# Altium PCB miaow-foc-board.bak.pcbdoc (part 1 of 2)
Units mm, origin at the board's own origin, x right, y up, seen from the top; angles counter-clockwise.
Board outline 70 x 80 mm, 6 copper layers (SIG1, GND2, SIG3, PWR4, GND5, SIG6), stack 1.538 mm thick; 418 components, 393 nets, 2057 pads, 83 vias.
Unrouted connection lines stored in the file: 1269.
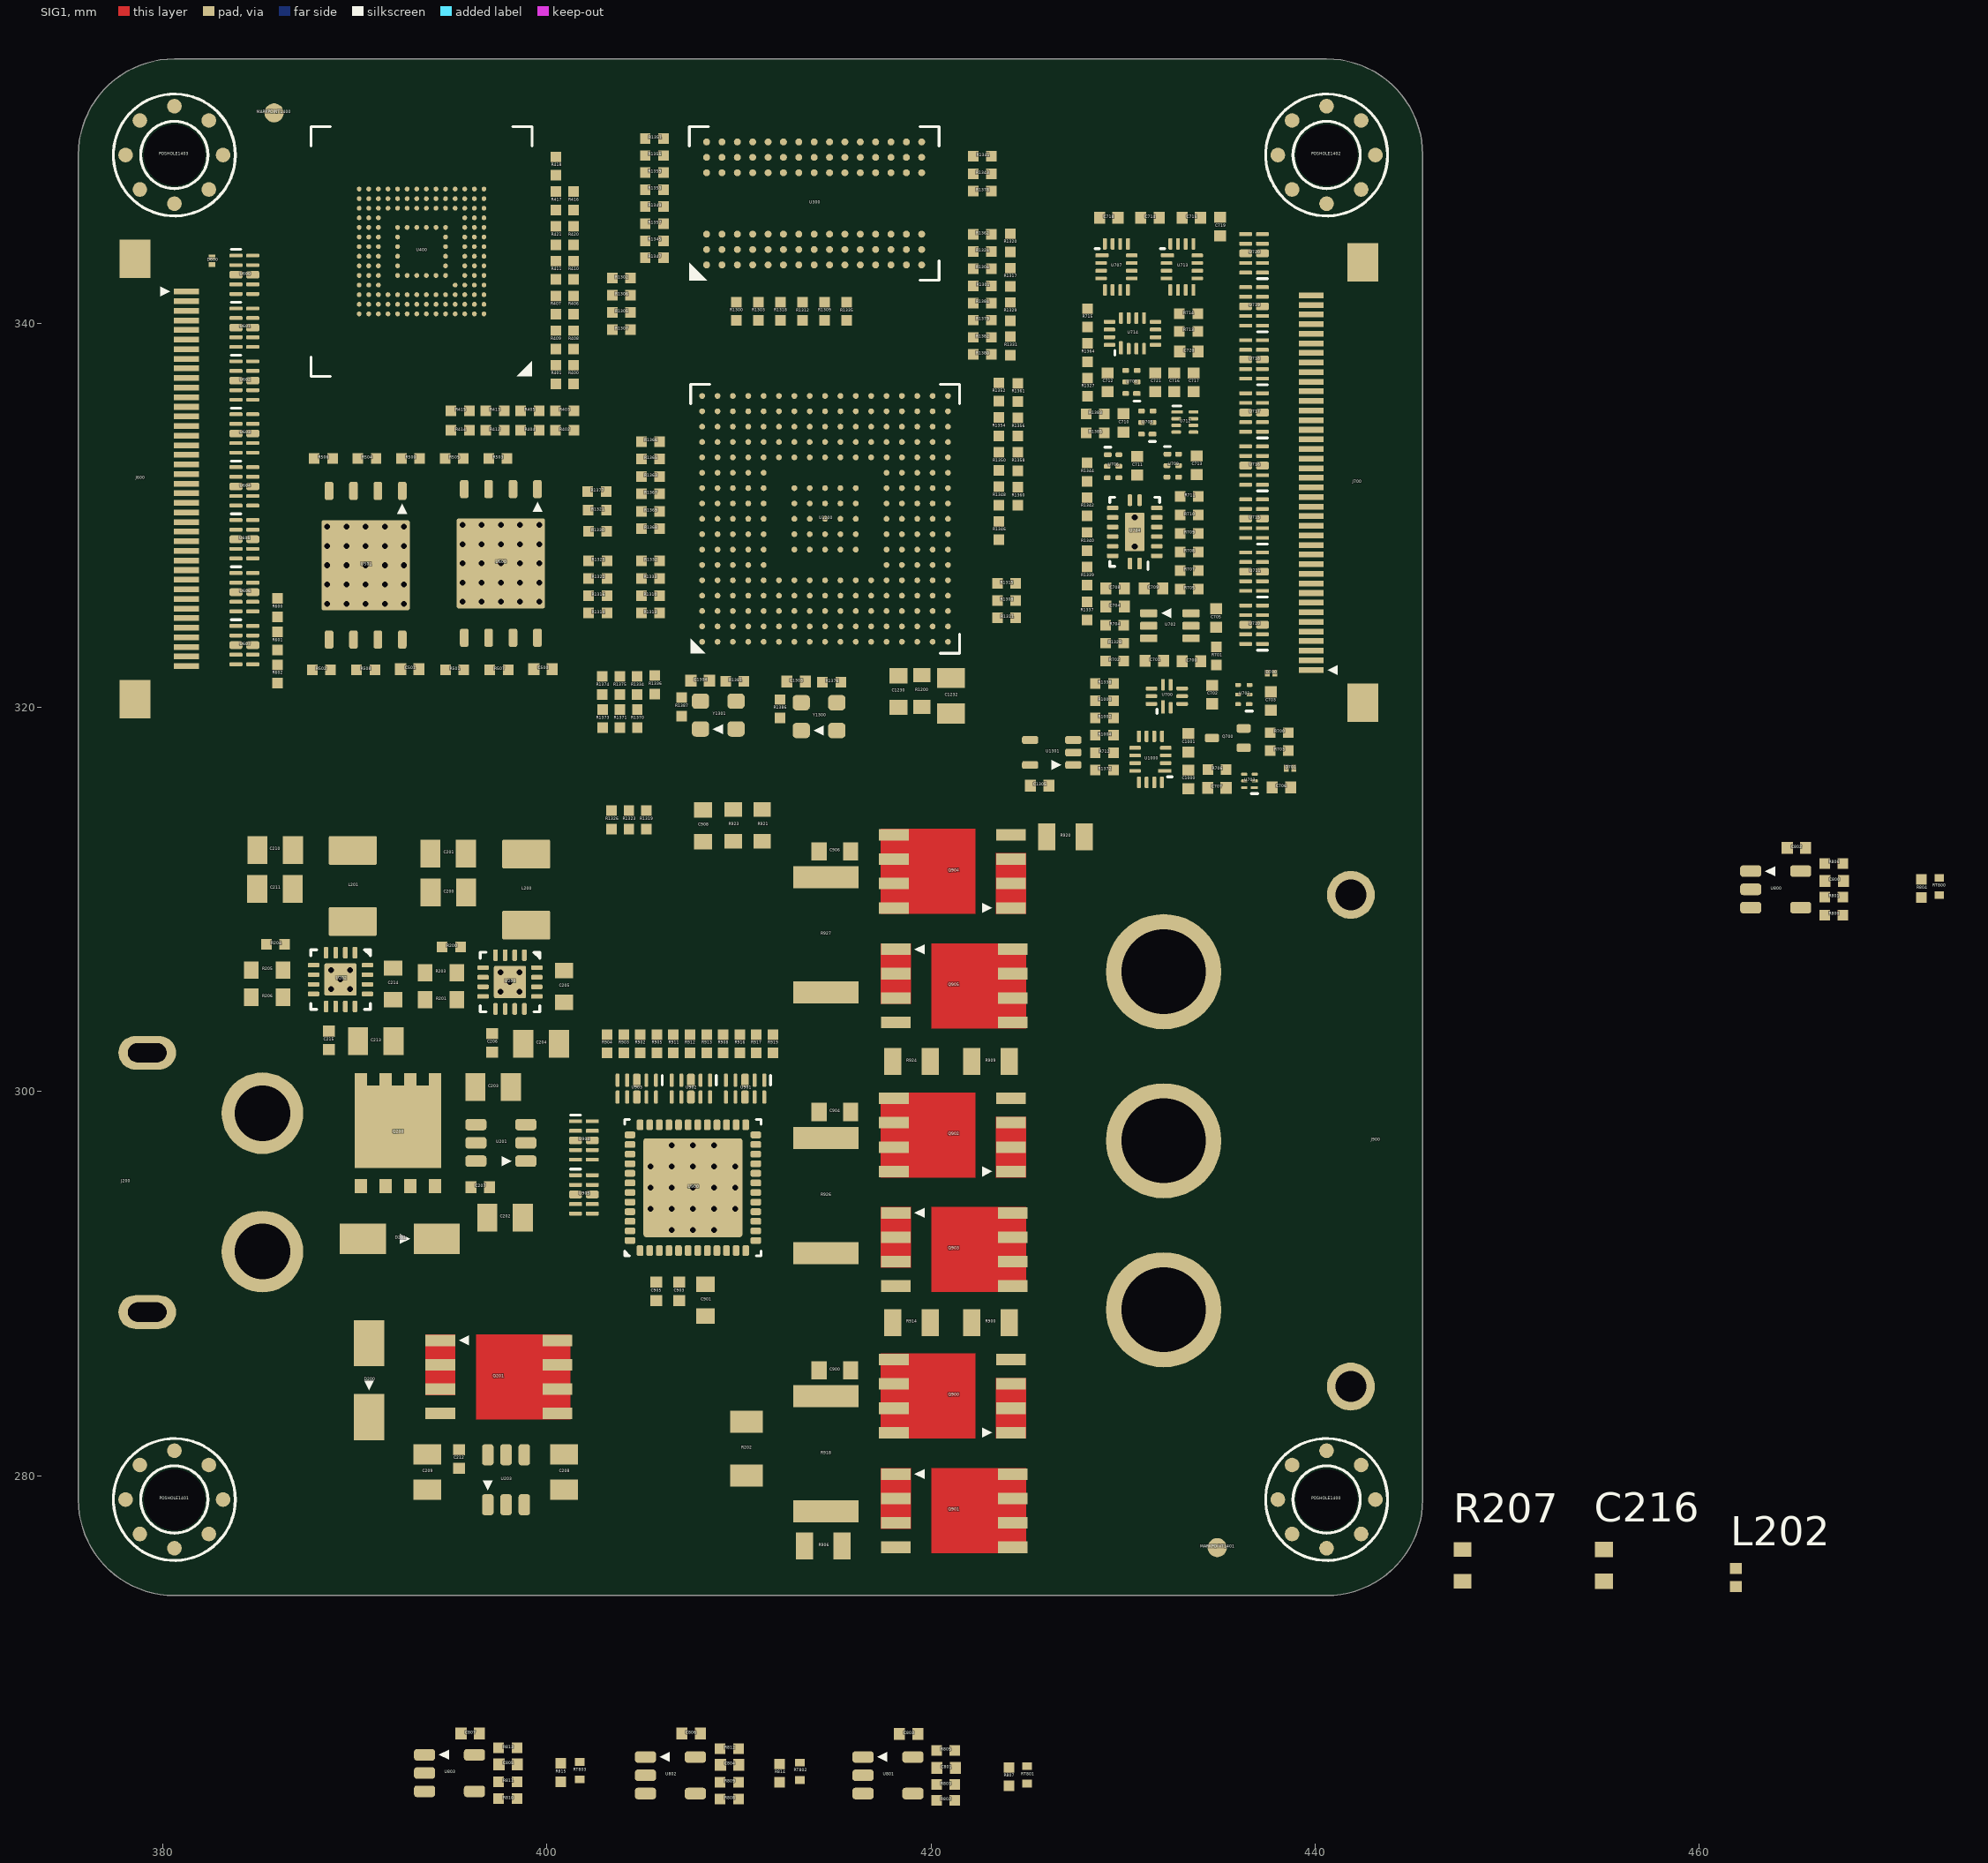
[diagram p0: SIG1 view]
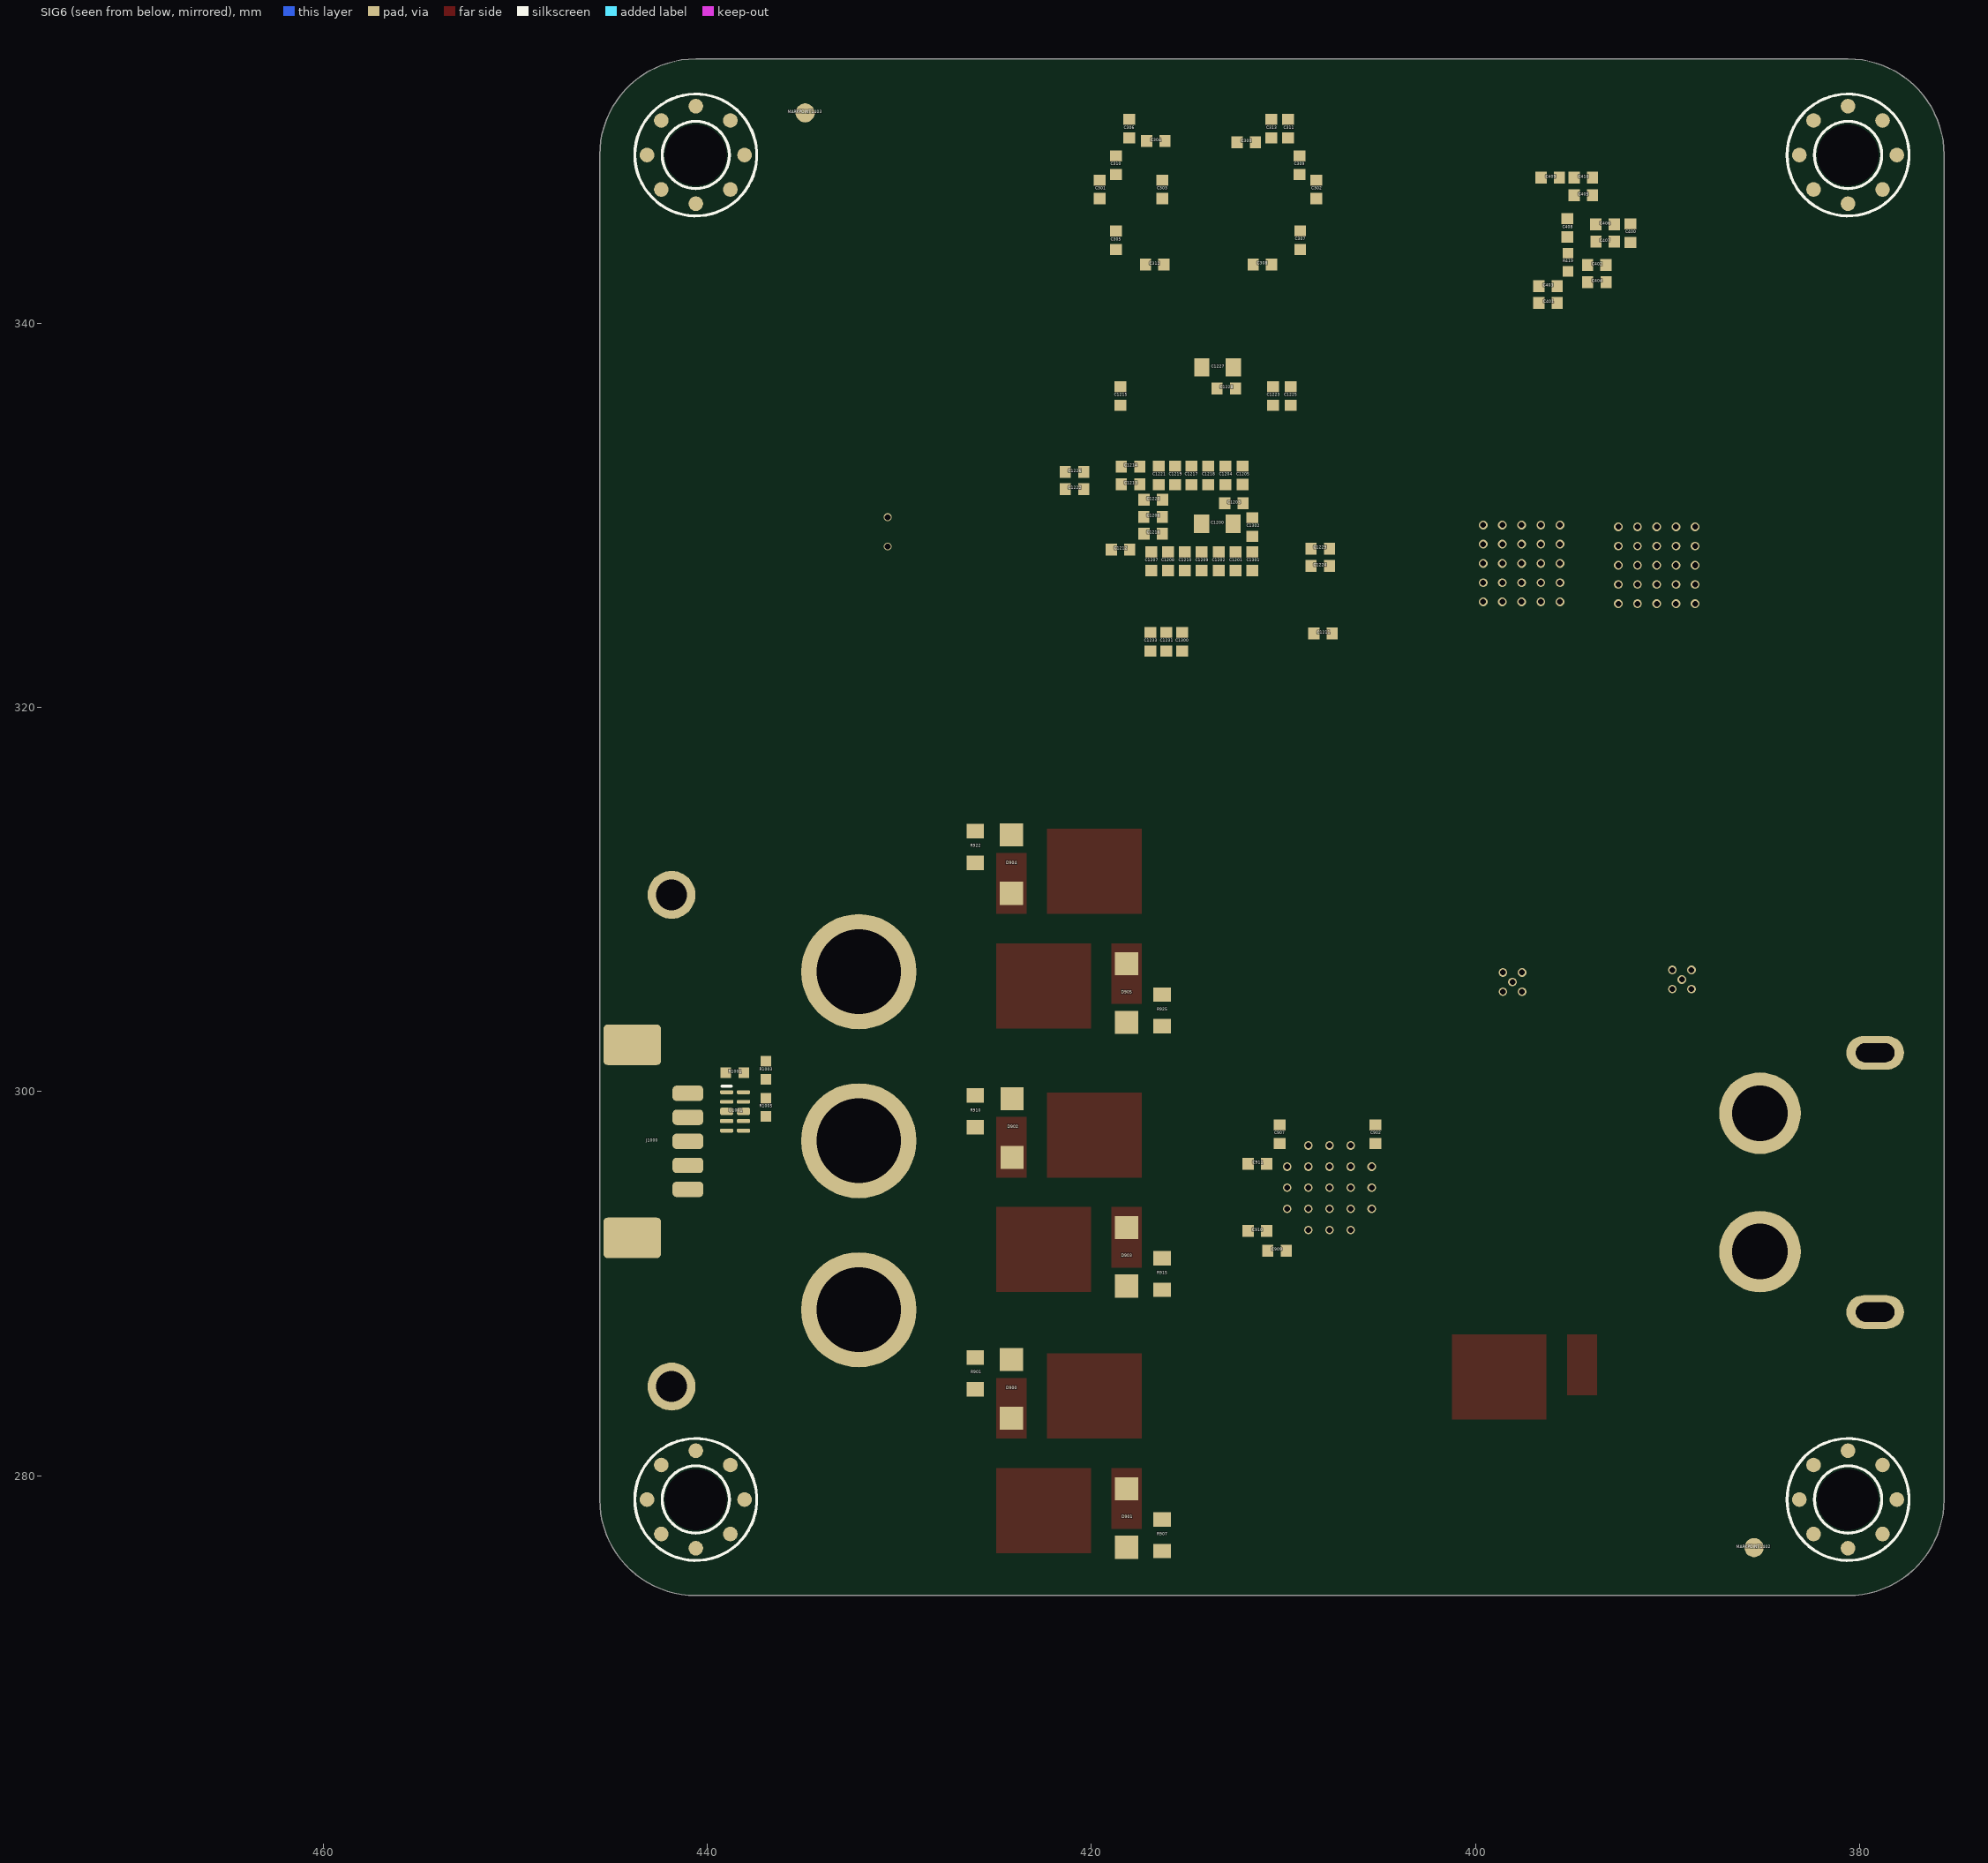
[diagram p1: SIG6 view, seen from below]
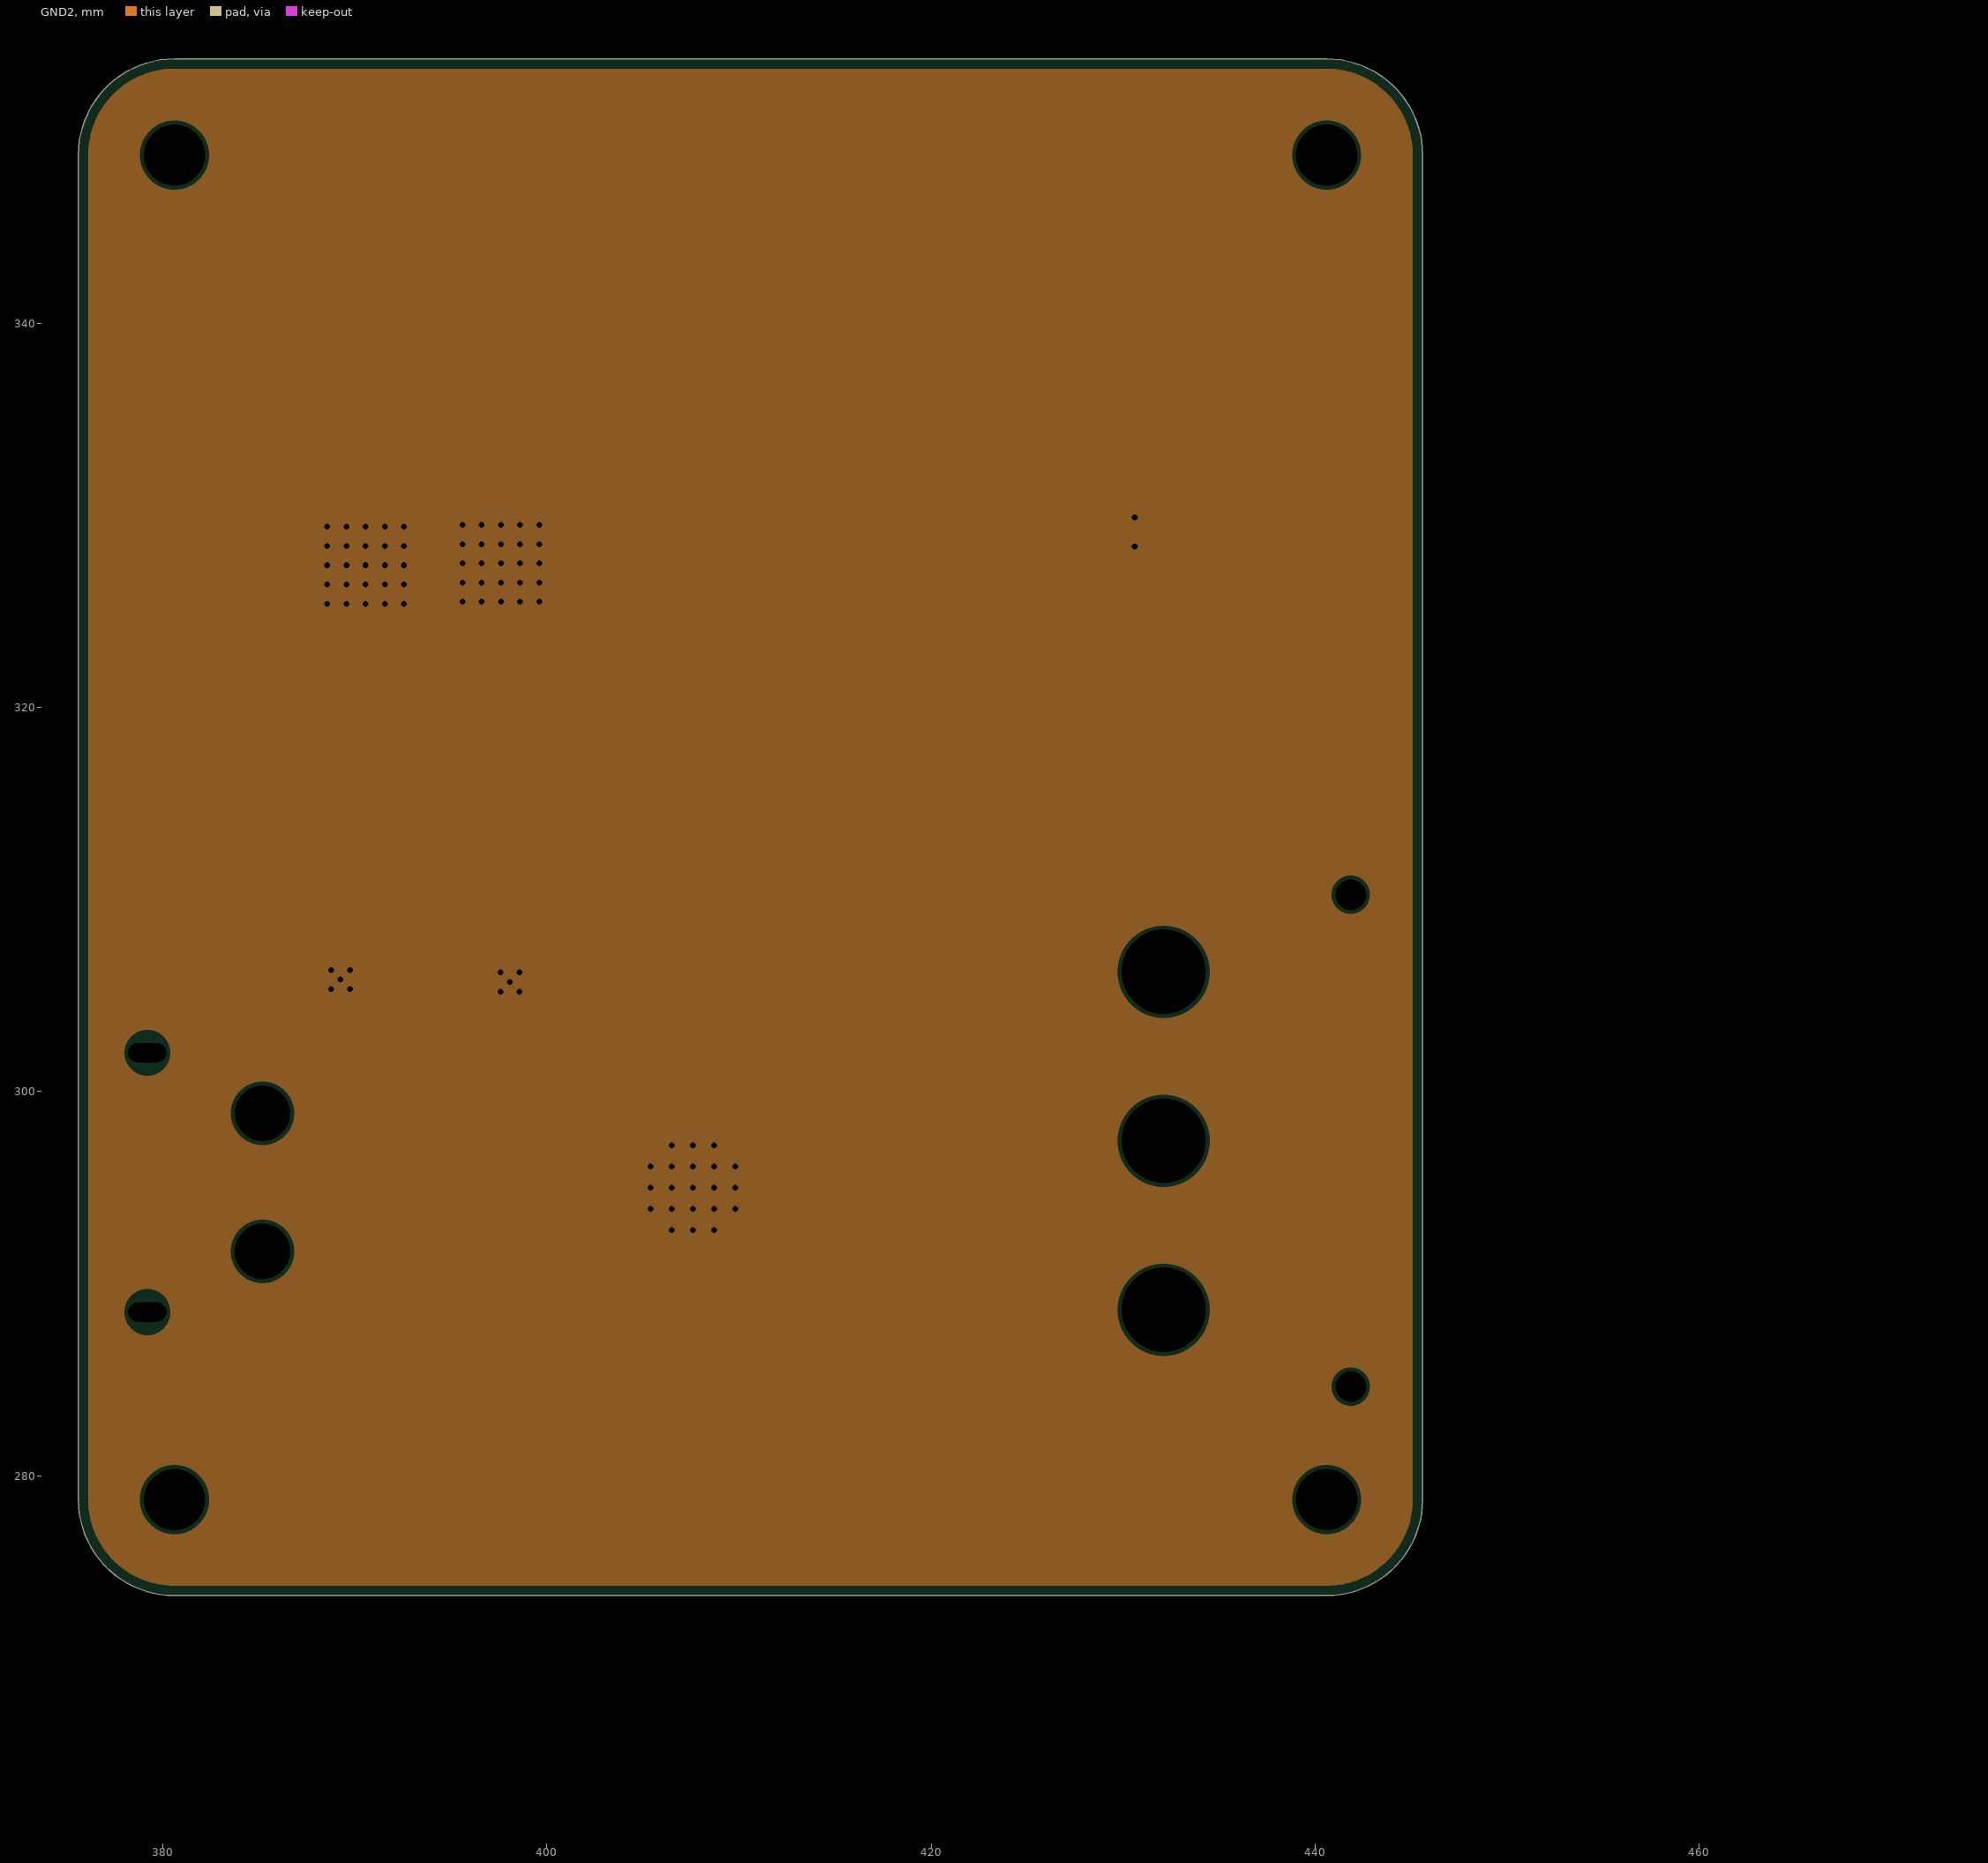
[diagram p2: GND2, clearances drawn from the general rule]
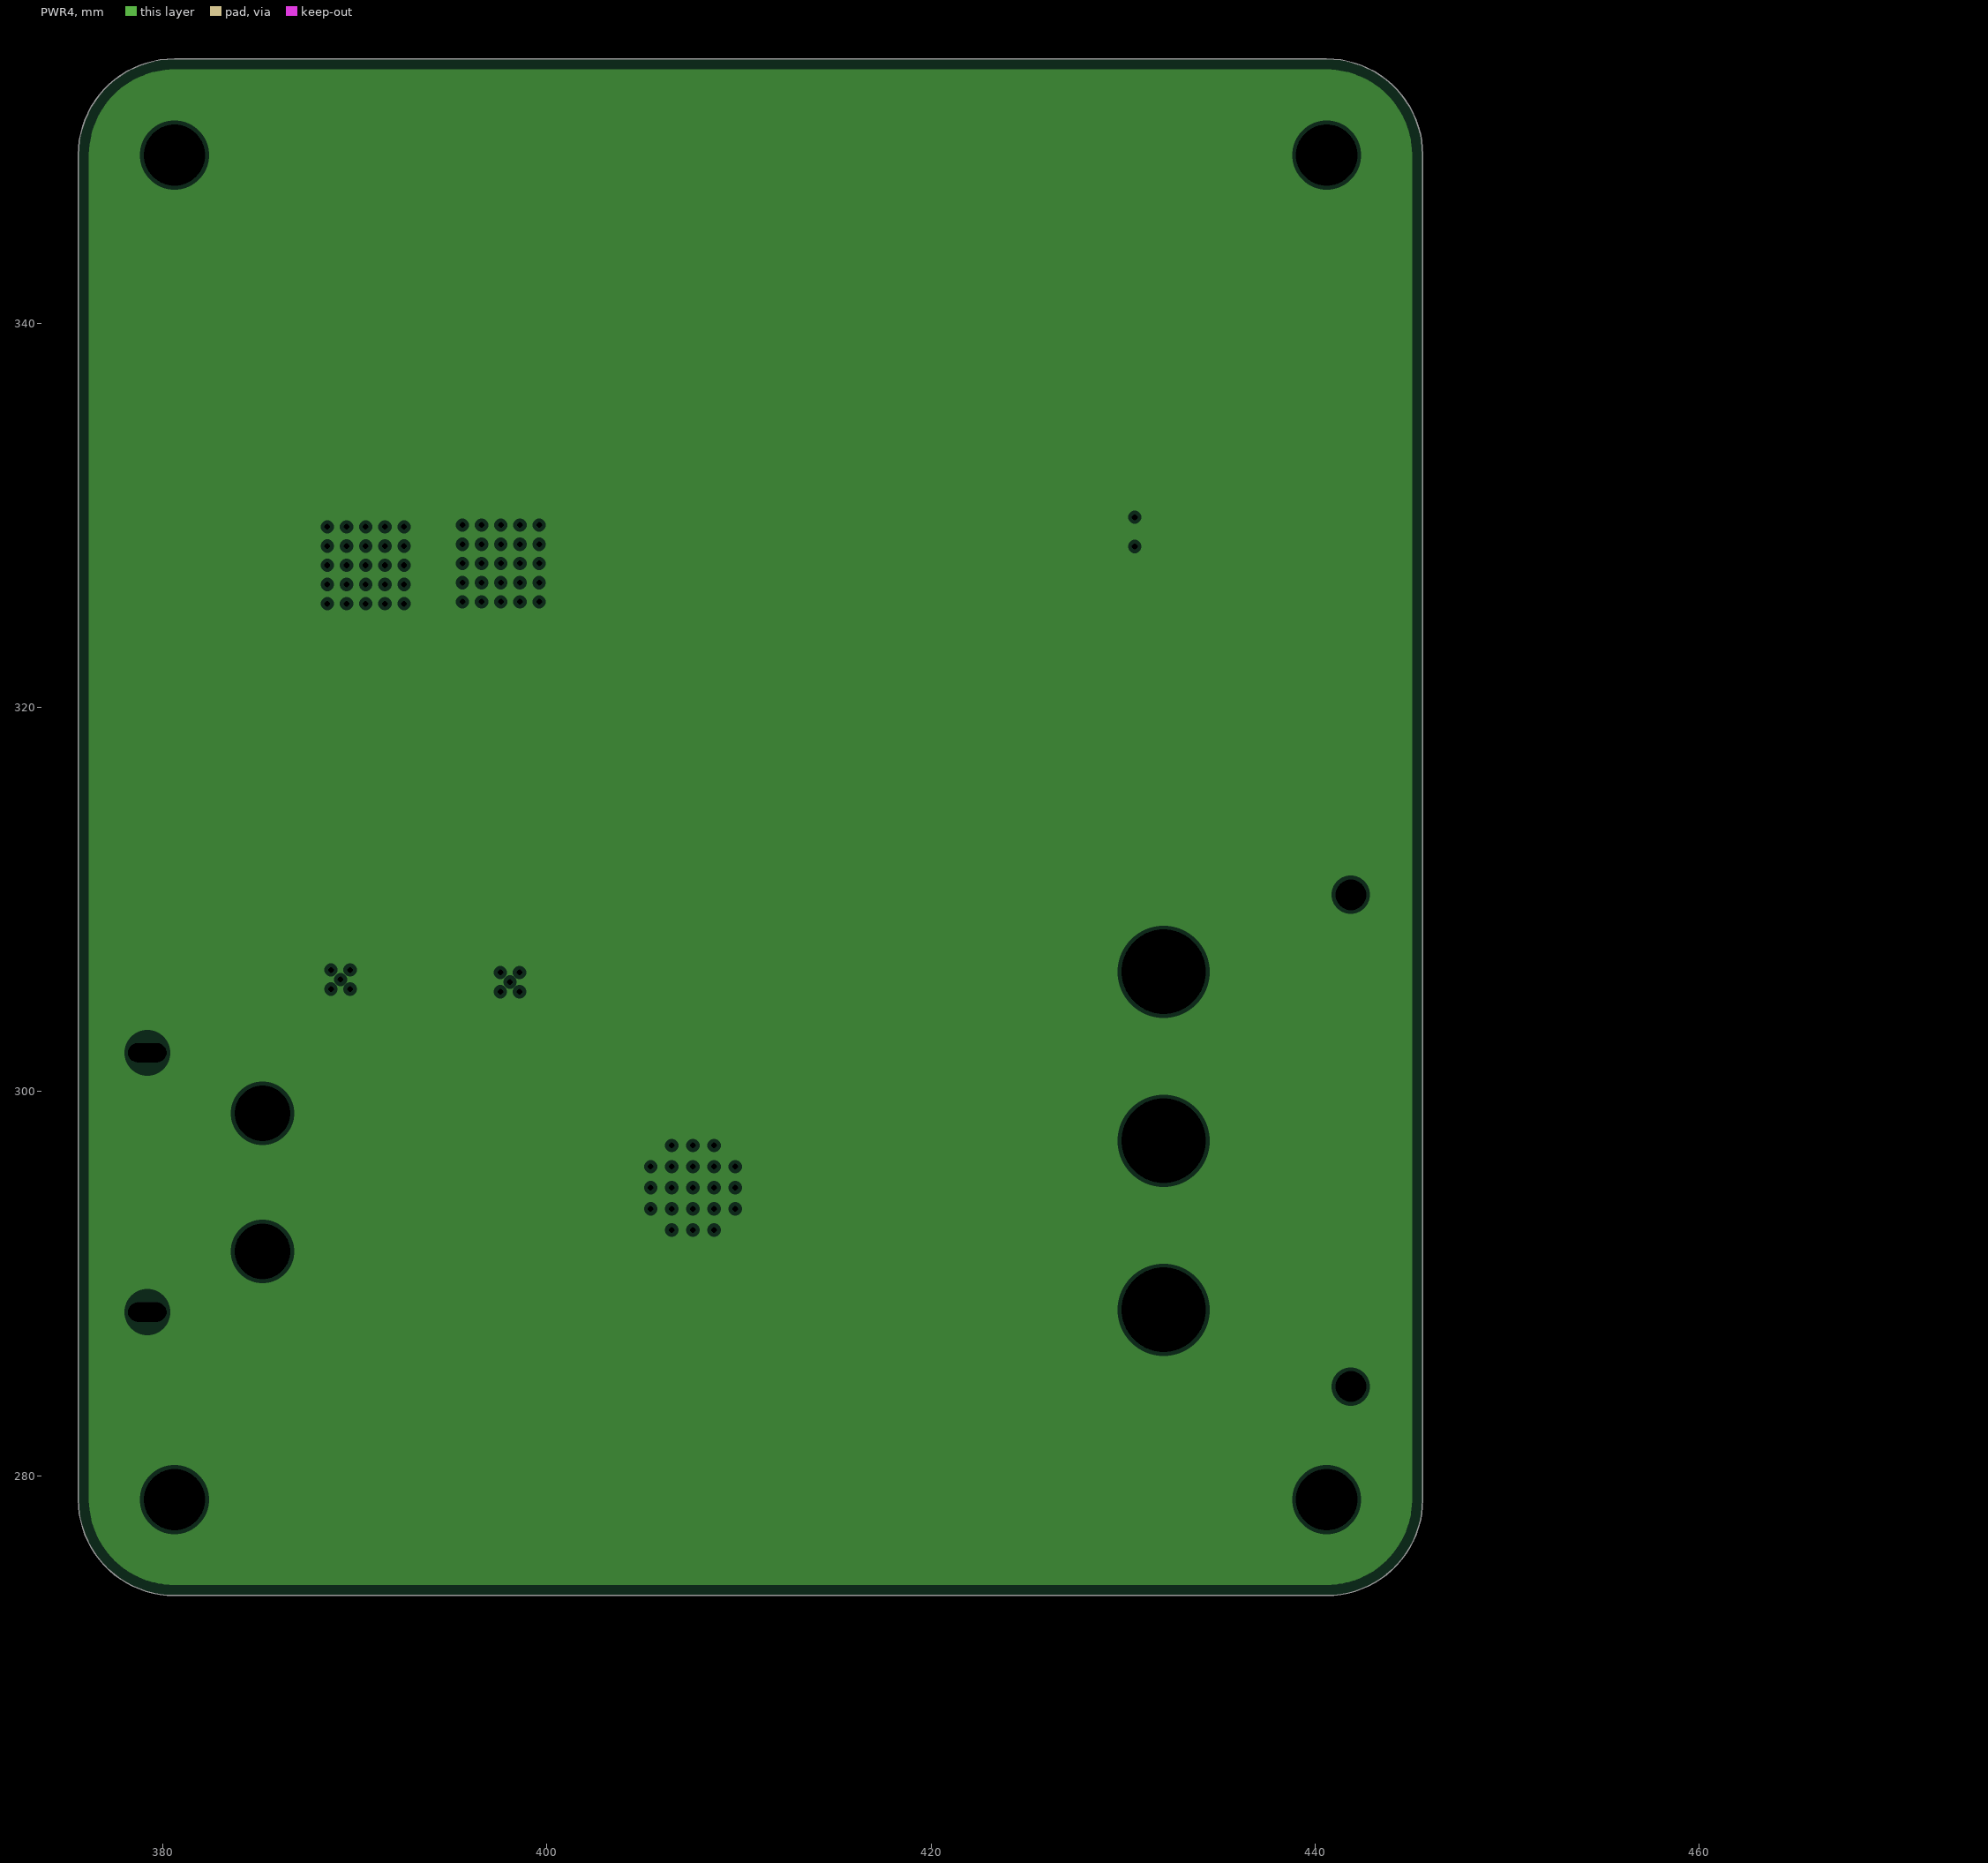
[diagram p3: PWR4, clearances drawn from the general rule]
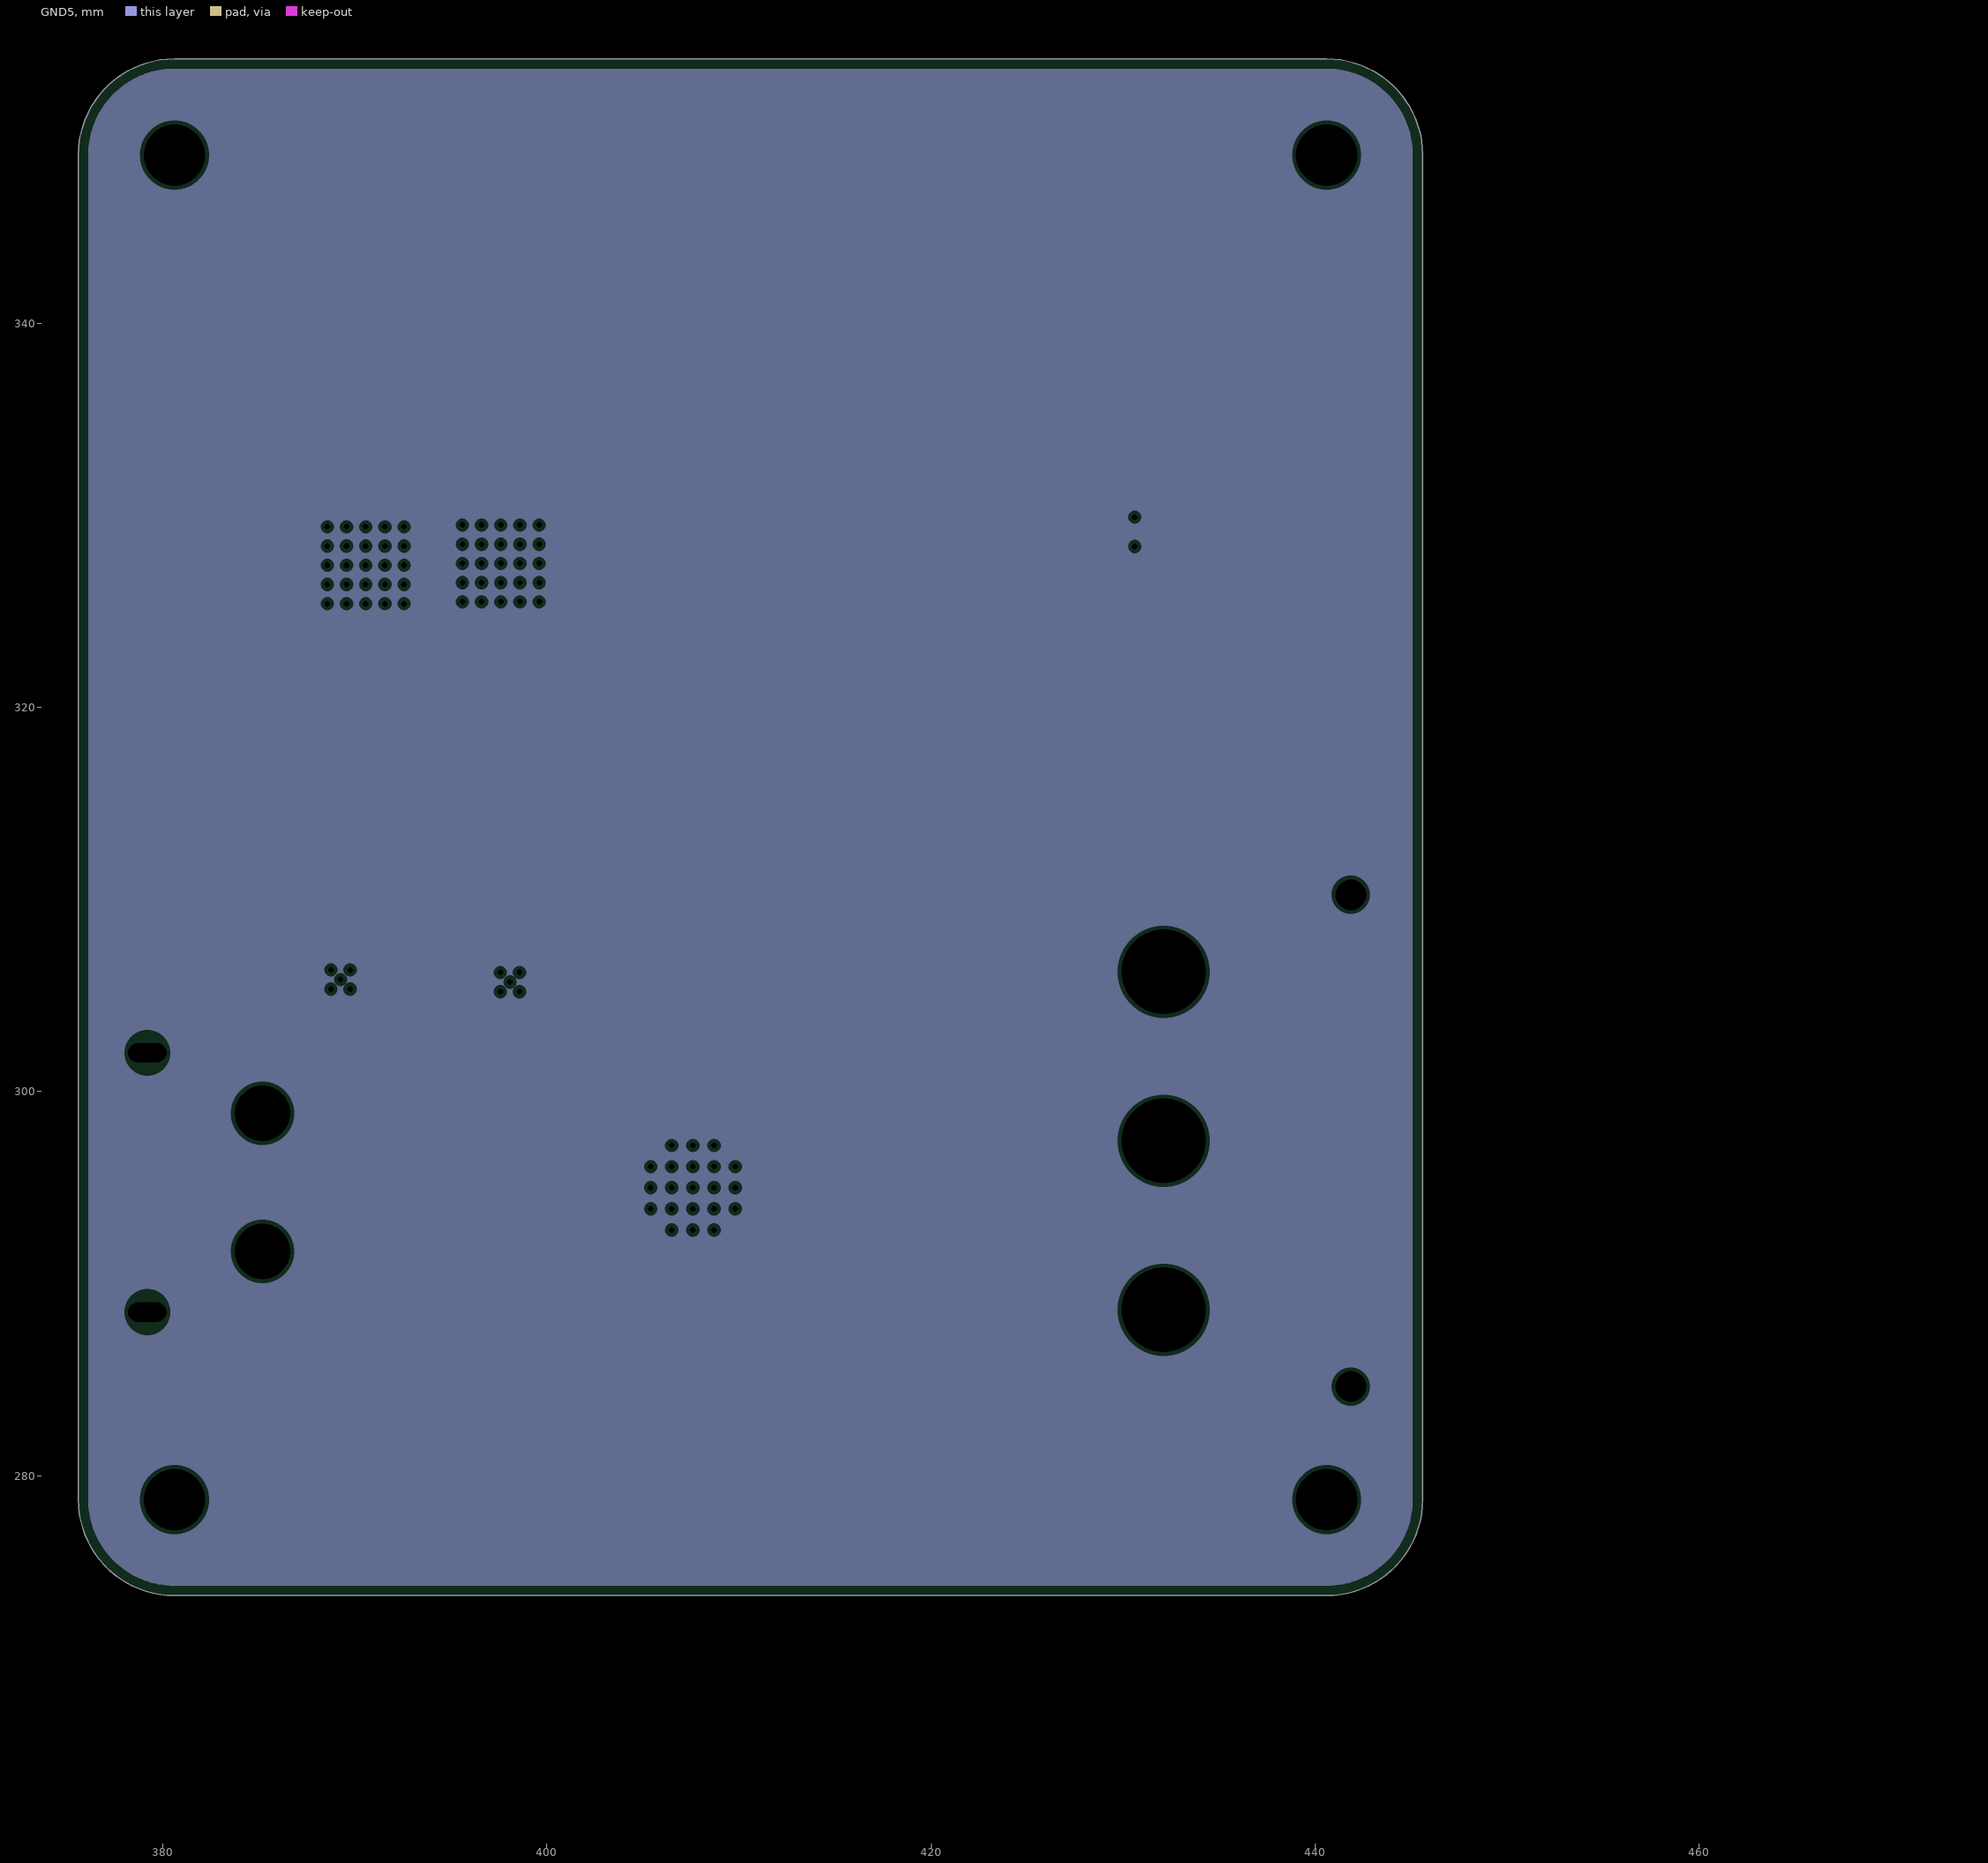
[diagram p4: GND5, clearances drawn from the general rule]

## Layer stack, top to bottom
Top Solder: solder mask 0.0102, Solder Resist, Dk 3.5
SIG1: signal copper 0.035
PP1: prepreg 0.0994, PP-015, Dk 4.3
GND2: plane copper 0.0152, net DRV_AGND
CORE2: core 0.55, Core-037, Dk 4.8
SIG3: signal copper 0.0152
PP3: prepreg 0.1088, PP-016, Dk 4.4
PWR4: plane copper 0.0152
PP4: core 0.55, Core-037, Dk 4.8
GND5: plane copper 0.0152
PP5: prepreg 0.0994, PP-015, Dk 4.3
SIG6: signal copper 0.035
Bottom Solder: solder mask 0.0102, Solder Resist, Dk 3.5

## Board outline
375.596,278.765 375.596,348.765 cw(c380.596,348.765) 380.596,353.765 440.596,353.765 cw(c440.596,348.765) 445.596,348.765 445.596,278.765 cw(c440.596,278.765) 440.596,273.765 380.596,273.765 cw(c380.596,278.765)

## Design rules (kind name [scope] priority, off if disabled: settings)
AcuteAngle AcuteAngle_1 [All] p1: isadvanced=TRUE minimum=9.00000000000000E+0001 checktracksonly=FALSE
AssemblyTestPointUsage [All] p1: isadvanced=TRUE
AssemblyTestpoint [All] p1: isadvanced=TRUE testpointundercomponent=TRUE minsize=1.016 maxsize=2.54 preferedsize=1.524 minholesize=0 maxholesize=1.016 preferedholesize=0.813 testpointgrid=0.025 usegrid=TRUE gridtolerance=0 allowsidetop=TRUE allowsidebottom=TRUE
BoardOutlineClearance [All] p1: isadvanced=TRUE gap=0.2 ignorepadtopadclearanceinfootprint=FALSE
Clearance Clearance_BGA [WithinRoom('BGA')] p1: isadvanced=TRUE gap=0.076 ignorepadtopadclearanceinfootprint=TRUE except(0: Arc-Hole Track-Hole SMDPad-Hole THPad-Hole Via-Hole Fill-Hole Poly-Hole Region-Hole Text-Hole Hole-Hole; 0.09: Arc-SMDPad Arc-Via Track-SMDPad Track-Via SMDPad-SMDPad SMDPad-Via SMDPad-Text THPad-Via Via-Via Via-Text; 0.1: Arc-THPad Track-THPad SMDPad-THPad THPad-THPad THPad-Text)
Clearance [All] p2: isadvanced=TRUE gap=0.089 ignorepadtopadclearanceinfootprint=TRUE except(0: Hole-Hole; 0.09: SMDPad-Text; 0.1: Arc-SMDPad Arc-THPad Arc-Hole Track-SMDPad Track-THPad Track-Hole SMDPad-SMDPad SMDPad-THPad SMDPad-Hole THPad-THPad THPad-Text THPad-Hole Via-Hole Fill-Hole Poly-Hole Region-Hole Text-Hole; 0.254: SMDPad-Via THPad-Via Via-Via)
Clearance Clearance_1_1 [(ExistsOnLayer('SIG3')) vs (ExistsOnLayer('SIG3'))] p3: gap=0.089 ignorepadtopadclearanceinfootprint=FALSE except(0.1: Arc-SMDPad Arc-THPad Track-SMDPad Track-THPad SMDPad-SMDPad SMDPad-THPad SMDPad-Via SMDPad-Fill SMDPad-Poly SMDPad-Region SMDPad-Text SMDPad-Hole THPad-THPad THPad-Via THPad-Fill THPad-Poly THPad-Region THPad-Text THPad-Hole) sourcerule=68 cellrowname=All cellrowtype=0 cellcolname=All cellcoltype=0 innerlayers=TRUE
Clearance Clearance_1_2 [(ExistsOnLayer('SIG1') Or ExistsOnLayer('SIG6')) vs (ExistsOnLayer('SIG1') Or ExistsOnLayer('SIG6'))] p4: gap=0.089 ignorepadtopadclearanceinfootprint=FALSE except(0.1: Arc-SMDPad Arc-THPad Track-SMDPad Track-THPad SMDPad-SMDPad SMDPad-THPad SMDPad-Via SMDPad-Fill SMDPad-Poly SMDPad-Region SMDPad-Text SMDPad-Hole THPad-THPad THPad-Via THPad-Fill THPad-Poly THPad-Region THPad-Text THPad-Hole) sourcerule=68 cellrowname=All cellrowtype=0 cellcolname=All cellcoltype=0 outerlayers=TRUE
Clearance Clearance_1 [All] p5: gap=0.254 ignorepadtopadclearanceinfootprint=FALSE ismatrix=TRUE
ComponentClearance [All] p1: isadvanced=TRUE gap=0.254 collisioncheckmode=3 verticalgap=0.254 showdistances=FALSE
FabricationTestPointUsage [All] p1: isadvanced=TRUE valid=0 allowmultiple=FALSE
FabricationTestpoint [All] p1: isadvanced=TRUE side=3 testpointundercomponent=TRUE minsize=1.016 maxsize=2.54 preferedsize=1.524 minholesize=0 maxholesize=1.016 preferedholesize=0.813 testpointgrid=0.025 allowsidetop=TRUE allowsidebottom=TRUE usegrid=TRUE gridtolerance=0
FanoutControl Fanout_BGA [IsBGA] p1: isadvanced=TRUE bgadir=Out bgaviamode=Centered fanoutstyle=Auto fanoutdirection=Alternating viagrid=0.025 // Fanout_BGA (Default Rule)
FanoutControl Fanout_LCC [IsLCC] p2: isadvanced=TRUE bgadir=Out bgaviamode=Centered fanoutstyle=Auto fanoutdirection=Alternating viagrid=0.025 // Fanout_LCC (Default Rule)
FanoutControl Fanout_SOIC [IsSOIC] p3: isadvanced=TRUE bgadir=Out bgaviamode=Centered fanoutstyle=Auto fanoutdirection=Alternating viagrid=0.025 // Fanout_SOIC (Default Rule)
FanoutControl Fanout_Small [(CompPinCount < 5)] p4: isadvanced=TRUE bgadir=Out bgaviamode=Centered fanoutstyle=Auto fanoutdirection=OutThenIn viagrid=0.025 // Fanout_Small (Default Rule)
FanoutControl Fanout_Default [All] p5: isadvanced=TRUE bgadir=Out bgaviamode=Centered fanoutstyle=Auto fanoutdirection=Alternating viagrid=0.025 // Fanout_Default (Default Rule)
Height [All] p1: isadvanced=TRUE minheight=0 maxheight=25.4 prefheight=12.7
HoleSize [All] p1: isadvanced=TRUE absolutevalues=TRUE maxlimit=6.3 minlimit=0.3 maxpercent=80.000 minpercent=20.000
HoleToHoleClearance [All] p1: isadvanced=TRUE gap=0.2 allowstackedmicrovias=TRUE
LayerPairs [All] p1: isadvanced=TRUE enforce=TRUE
MatchedLengths "Schematic Matched Net Lengths_1" [InxSignalClass('XCLS_SDRAM_DAT')] p1: isadvanced=TRUE tolerance=2.54 checknetsindiffpair=FALSE checkdiffpairvsdiffpair=TRUE checkxsignals=TRUE checkothers=TRUE
MatchedLengths "Schematic Matched Net Lengths_5" [InxSignalClass('XCLS_SDRAM_CTL')] p2: isadvanced=TRUE tolerance=2.54 checknetsindiffpair=FALSE checkdiffpairvsdiffpair=TRUE checkxsignals=TRUE checkothers=TRUE
MatchedLengths "Schematic Matched Net Lengths_8" [InxSignalClass('XCLS_SDRAM_CLK')] p3: isadvanced=TRUE tolerance=2.54 checknetsindiffpair=FALSE checkdiffpairvsdiffpair=TRUE checkxsignals=TRUE checkothers=TRUE
MatchedLengths "Schematic Matched Net Lengths" [InxSignalClass('XCLS_SDRAM_ADR')] p4: isadvanced=TRUE tolerance=2.54 checknetsindiffpair=FALSE checkdiffpairvsdiffpair=TRUE checkxsignals=TRUE checkothers=TRUE
MatchedLengths "Schematic Matched Net Lengths_7" [InxSignalClass('XCLS_NOR')] p5: isadvanced=TRUE tolerance=2.54 checknetsindiffpair=FALSE checkdiffpairvsdiffpair=TRUE checkxsignals=TRUE checkothers=TRUE
MatchedLengths "Schematic Matched Net Lengths_3" [InxSignalClass('XCLS_LCD_DAT')] p6: isadvanced=TRUE tolerance=2.54 checknetsindiffpair=FALSE checkdiffpairvsdiffpair=TRUE checkxsignals=TRUE checkothers=TRUE
MatchedLengths "Schematic Matched Net Lengths_6" [InxSignalClass('XCLS_LCD_CTL')] p7: isadvanced=TRUE tolerance=2.54 checknetsindiffpair=FALSE checkdiffpairvsdiffpair=TRUE checkxsignals=TRUE checkothers=TRUE
MatchedLengths "Schematic Matched Net Lengths_2" [InxSignalClass('XCLS_EMMC')] p8: isadvanced=TRUE tolerance=2.54 checknetsindiffpair=FALSE checkdiffpairvsdiffpair=TRUE checkxsignals=TRUE checkothers=TRUE
MatchedLengths "Schematic Matched Net Lengths_4" [InxSignalClass('XCLS_DRV_PWM')] p9: isadvanced=TRUE tolerance=2.54 checknetsindiffpair=FALSE checkdiffpairvsdiffpair=TRUE checkxsignals=TRUE checkothers=TRUE
MatchedLengths "Schematic Matched Net Lengths_9" [InxSignalClass('XCLS_DBG_TRACE')] p10: isadvanced=TRUE tolerance=2.54 checknetsindiffpair=FALSE checkdiffpairvsdiffpair=TRUE checkxsignals=TRUE checkothers=TRUE
MinimumAnnularRing MinimumAnnularRing_1 [All] p1: isadvanced=TRUE minimumring=0.05
MinimumSolderMaskSliver [All] p1: isadvanced=TRUE minsoldermaskwidth=0.1
NetAntennae [All] p1: isadvanced=TRUE netantennaetolerance=0
PasteMaskExpansion [All] p1: isadvanced=TRUE expansion=0
PlaneClearance [All] p1: isadvanced=TRUE clearance=0.2
PlaneConnect [All] p1: isadvanced=TRUE planeconnectstyle=Direct reliefexpansion=0.508 reliefentries=4 reliefconductorwidth=0.254 reliefairgap=0.254
PolygonConnect [All] p1: connectstyle=Direct reliefconductorwidth=0.254 reliefentries=4 polygonreliefangle="90 Angle" airgapwidth=0.254
ReturnPath ReturnPath_D100 [All] p1: isadvanced=TRUE impedanceprofileid={DFDD3AD9-9982-41F8-B22F-11EDC476DA28} _gaplimit=0
ReturnPath ReturnPath_D90 [All] p2: isadvanced=TRUE impedanceprofileid={0FC84D08-B4C9-4064-B907-74255722413B} _gaplimit=0
ReturnPath ReturnPath_S50 [All] p3: isadvanced=TRUE impedanceprofileid={03BA4CF9-3E57-4DDB-808C-C94DDB6C1FE8} _gaplimit=0
RoutingCorners [All] p1: isadvanced=TRUE cornerstyle=45-Degree minsetback=2.54 maxsetback=2.54
RoutingPriority [All] p1: isadvanced=TRUE routingpriority=0
RoutingVias RoutingViaStyle_BGA [WithinRoom('BGA')] p1: isadvanced=TRUE holewidth=0.3 width=0.4 viastyle="Through Hole" minholewidth=0.3 minwidth=0.4 maxholewidth=0.3 maxwidth=0.4
RoutingVias RoutingViaStyle [All] p2: isadvanced=TRUE holewidth=0.3 width=0.45 viastyle="Through Hole" minholewidth=0.3 minwidth=0.4 maxholewidth=0.3 maxwidth=0.45
RoutingVias [All] p3 off: holewidth=0.3 width=0.45 viastyle="Through Hole" minholewidth=0.3 minwidth=0.45 maxholewidth=0.3 maxwidth=0.45
ShortCircuit ShortCircuit_MOS [HasFootprint('IAUC100N04S6N022') or HasFootprint('CSD18534Q5A')] p1: isadvanced=TRUE allowed=TRUE
ShortCircuit [All] p2: isadvanced=TRUE allowed=FALSE
SilkToSilkClearance [All] p1 off: isadvanced=TRUE silktosilkclearance=0
SilkToSolderMaskClearance [IsPad] p1: isadvanced=TRUE minsilkscreentomaskgap=0 clearancetoexposedcopper=TRUE
SolderMaskExpansion SolderMaskExpansion_Via [IsVia] p1: isadvanced=TRUE expansion=0 istentingtop=TRUE
SolderMaskExpansion [All] p2: isadvanced=TRUE expansion=0 istentingtop=FALSE
SupplyNets "Schematic Supply Nets_10" [InNet('GDRVA')] p1: voltage=0.000
SupplyNets "Schematic Supply Nets_8" [InNet('VMOT')] p2: voltage=0.000
SupplyNets "Schematic Supply Nets_5" [InNet('GDRVP')] p3: voltage=0.000
SupplyNets "Schematic Supply Nets_7" [InNet('VMCUA')] p4: isadvanced=TRUE voltage=0.000
SupplyNets "Schematic Supply Nets_6" [InNet('+3V3')] p5: isadvanced=TRUE voltage=0.000
SupplyNets "Schematic Supply Nets_4" [InNet('+5V')] p6: isadvanced=TRUE voltage=0.000
SupplyNets "Schematic Supply Nets_3" [InNet('DRV_PGND')] p7: isadvanced=TRUE voltage=0.000
SupplyNets "Schematic Supply Nets_2" [InNet('VBAT')] p8: isadvanced=TRUE voltage=0.000
UnRoutedNet [All] p1: isadvanced=TRUE
UnpouredPolygon [All] p1: isadvanced=TRUE
ViasUnderSMD [All] p1: isadvanced=TRUE allowed=TRUE
Width MaxMinWidth_BGA [WithinRoom('BGA')] p1: isadvanced=TRUE maxlimit=25.375 minlimit=0.076 preferedwidth=0.102 minimp=50.000000 maximp=50.000000 favimp=50.000000
Width [All] p2: maxlimit=25.375 minlimit=0.089 preferedwidth=0.152 minimp=50.000000 maximp=50.000000 favimp=50.000000
4 further rules are at their usual default settings.

## Classes and differential pairs
net class CLS_PWR: +3V3 +5V VBAT VDBG_C VMCUA VMOT VREF+
net class CLS_GND: GDRVA GDRVP

## Components (designator, comment, footprint, x,y, rotation, side; value= is the part's Value field where it differs from the comment)
C200 "C-NOMO" C0805 394.867,310.377 r0 top value=22uF
C201 "C-NOMO" C0805 394.852,312.388 r0 top value=22uF
C202 "C-NOMO" C0805 397.819,293.439 r180 top value=10uF
C203 "C-NOMO" C0805 397.198,300.238 r180 top value=10uF
C204 "C-NOMO" C0805 399.692,302.491 r180 top value=10uF
C205 "C-NOMO" C0603 400.885,305.474 r270 top value=100nF
C206 "C-NOMO" C0402 397.152,302.536 r90 top value=3.3nF
C207 "C-NOMO" C0402 396.518,295.017 r0 top value=100nF
C208 "C-NOMO" C0805 400.884,280.194 r90 top value=10uF
C209 "C-NOMO" C0805 393.775,280.194 r90 top value=10uF
C210 "C-NOMO" C0805 385.845,312.572 r0 top value=22uF
C211 "C-NOMO" C0805 385.833,310.561 r180 top value=22uF
C212 "C-NOMO" C0402 395.416,280.874 r270 top value=100nF
C213 "C-NOMO" C0805 391.082,302.62 r180 top value=10uF
C214 "C-NOMO" C0603 391.988,305.604 r270 top value=100nF
C215 "C-NOMO" C0402 388.634,302.665 r90 top value=3.3nF
C216 "C-NOMO" C0603 455.041,275.336 r90 top value=1uF
C300 "C-NOMO" C0402 411.93,349.427 r0 bottom value=100nF
C301 "C-NOMO" C0402 419.555,346.975 r90 bottom value=100nF
C302 "C-NOMO" C0402 408.29,346.975 r90 bottom value=100nF
C303 "C-NOMO" C0402 416.297,346.975 r90 bottom value=100nF
C304 "C-NOMO" C0402 416.642,349.492 r0 bottom value=100nF
C305 "C-NOMO" C0402 418.711,344.321 r270 bottom value=100nF
C306 "C-NOMO" C0402 418.033,350.13 r270 bottom value=100nF
C307 "C-NOMO" C0402 409.124,344.321 r270 bottom value=100nF
C308 "C-NOMO" C0402 411.097,343.056 r0 bottom value=100nF
C309 "C-NOMO" C0402 409.159,348.234 r270 bottom value=100nF
C310 "C-NOMO" C0402 418.718,348.234 r270 bottom value=100nF
C311 "C-NOMO" C0402 409.752,350.13 r270 bottom value=100nF
C312 "C-NOMO" C0402 416.705,343.056 r180 bottom value=100nF
C313 "C-NOMO" C0402 410.622,350.13 r270 bottom value=100nF
C400 "C-NOMO" C0402 391.925,344.696 r270 bottom value=2.2uF
C401 "C-NOMO" C0402 396.218,341.068 r0 bottom value=2.2uF
C402 "C-NOMO" C0402 393.682,343.042 r0 bottom value=100nF
C403 "C-NOMO" C0402 396.218,341.924 r0 bottom value=100nF
C404 "C-NOMO" C0402 393.68,342.138 r0 bottom value=100nF
C405 "C-NOMO" C0402 394.376,346.669 r0 bottom value=100nF
C406 "C-NOMO" C0402 393.25,345.151 r180 bottom value=100nF
C407 "C-NOMO" C0402 393.245,344.256 r180 bottom value=100nF
C408 "C-NOMO" C0402 395.204,344.975 r90 bottom value=100nF
C409 "C-NOMO" C0402 396.1,347.577 r180 bottom value=100nF
C410 "C-NOMO" C0402 394.376,347.579 r0 bottom value=2.2uF
C500 "C-NOMO" C0402 399.795,321.99 r180 top value=100nF
C501 "C-NOMO" C0402 392.855,321.99 r180 top value=100nF
C700 "C-NOMO" C0402 433.551,322.401 r0 top value=100nF
C701 "C-NOMO" C0402 431.625,322.428 r0 top value=100nF
C702 "C-NOMO" C0402 434.638,320.671 r270 top value=100nF
C703 "C-NOMO" C0402 437.693,320.331 r270 top value=100nF
C704 "C-NOMO" C0402 429.579,325.256 r0 top value=100nF
C705 "C-NOMO" C0402 434.835,324.66 r270 top value=100nF
C706 "C-NOMO" C0402 438.242,315.838 r180 top value=100nF
C707 "C-NOMO" C0402 434.881,315.823 r180 top value=100nF
C708 "C-NOMO" C0402 429.579,326.192 r180 top value=100nF
C709 "C-NOMO" C0402 431.586,326.192 r0 top value=100nF
C710 "C-NOMO" C0402 430.026,334.815 r90 top value=100nF
C711 "C-NOMO" C0402 430.722,332.579 r270 top value=100nF
C712 "C-NOMO" C0402 429.189,336.925 r90 top value=100nF
C713 "C-NOMO" C0402 433.832,332.61 r270 top value=100nF
C714 "C-NOMO" C0402 431.399,345.493 r180 top value=100nF
C715 "C-NOMO" C0402 433.548,345.493 r180 top value=100nF
C716 "C-NOMO" C0402 432.664,336.925 r270 top value=100nF
C717 "C-NOMO" C0402 433.678,336.925 r90 top value=100nF
C718 "C-NOMO" C0402 429.25,345.493 r0 top value=100nF
C719 "C-NOMO" C0402 435.047,345.033 r270 top value=100nF
C720 "C-NOMO" C0402 433.43,338.536 r180 top value=100nF
C721 "C-NOMO" C0402 431.676,336.925 r270 top value=100nF
C800 "C-NOMO" C0402 467.025,310.972 r0 top value=10pF
C801 "C-NOMO" C0402 420.779,264.784 r0 top value=10pF
C802 "C-NOMO" C0402 465.062,312.688 r0 top value=100nF
C803 "C-NOMO" C0402 418.834,266.549 r0 top value=100nF
C804 "C-NOMO" C0402 409.515,264.95 r180 top value=10pF
C805 "C-NOMO" C0402 397.98,264.98 r180 top value=10pF
C806 "C-NOMO" C0402 407.507,266.591 r0 top value=100nF
C807 "C-NOMO" C0402 396.003,266.575 r0 top value=100nF
C900 "C-NOMO" C0603 414.986,285.491 r0 top value=2.2uF
C901 "C-NOMO" C0603 408.249,289.141 r90 top value=2.2uF
C902 "C-NOMO" C0402 405.203,297.781 r90 bottom value=1uF
C903 "C-NOMO" C0402 406.884,289.596 r90 top value=1uF
C904 "C-NOMO" C0603 414.986,298.937 r0 top value=2.2uF
C905 "C-NOMO" C0402 405.684,289.596 r90 top value=47nF
C906 "C-NOMO" C0603 414.986,312.511 r0 top value=2.2uF
C907 "C-NOMO" C0402 410.203,297.781 r270 bottom value=1uF
C908 "C-NOMO" C0603 408.129,313.838 r90 top value=10nF
C909 "C-NOMO" C0402 410.328,291.723 r180 bottom value=1nF
C910 "C-NOMO" C0402 411.353,292.748 r180 bottom value=1nF
C911 "C-NOMO" C0402 411.353,296.248 r180 bottom value=1nF
C1000 "C-NOMO" C0402 433.393,316.256 r90 top value=100nF
C1001 "C-NOMO" C0402 433.388,318.163 r90 top value=100nF
C1200 "C-NOMO" C0603 413.44,329.564 r180 bottom value=4.7uF
C1201 "C-NOMO" C0402 412.495,327.611 r270 bottom value=100nF
C1202 "C-NOMO" C0402 413.374,327.611 r270 bottom value=100nF
C1203 "C-NOMO" C0402 412.575,330.623 r180 bottom value=100nF
C1204 "C-NOMO" C0402 413.024,332.078 r90 bottom value=100nF
C1205 "C-NOMO" C0402 412.129,332.088 r90 bottom value=100nF
C1206 "C-NOMO" C0402 416.78,329.915 r0 bottom value=100nF
C1207 "C-NOMO" C0402 416.889,327.611 r270 bottom value=100nF
C1208 "C-NOMO" C0402 416.01,327.611 r270 bottom value=100nF
C1209 "C-NOMO" C0402 414.253,327.611 r270 bottom value=100nF
C1210 "C-NOMO" C0402 415.132,327.611 r270 bottom value=100nF
C1211 "C-NOMO" C0402 407.934,323.849 r180 bottom value=100nF
C1212 "C-NOMO" C0402 418.48,328.221 r180 bottom value=100nF
C1213 "C-NOMO" C0402 417.957,331.621 r180 bottom value=100nF
C1214 "C-NOMO" C0402 417.957,332.535 r180 bottom value=100nF
C1215 "C-NOMO" C0402 418.48,336.221 r90 bottom value=100nF
C1216 "C-NOMO" C0402 416.779,329.055 r0 bottom value=100nF
C1217 "C-NOMO" C0402 414.796,332.079 r90 bottom value=100nF
C1218 "C-NOMO" C0402 413.907,332.083 r90 bottom value=100nF
C1219 "C-NOMO" C0402 415.627,332.077 r90 bottom value=100nF
C1220 "C-NOMO" C0402 416.774,330.826 r0 bottom value=100nF
C1221 "C-NOMO" C0402 416.497,332.075 r90 bottom value=100nF
C1222 "C-NOMO" C0402 420.88,331.37 r0 bottom value=2.2uF
C1223 "C-NOMO" C0402 410.531,336.221 r90 bottom value=2.2uF
C1224 "C-NOMO" C0402 408.08,327.37 r180 bottom value=100nF
C1225 "C-NOMO" C0402 409.629,336.221 r90 bottom value=100nF
C1226 "C-NOMO" C0402 420.88,332.271 r180 bottom value=100nF
C1227 "C-NOMO" C0603 413.424,337.707 r180 bottom value=1uF
C1228 "C-NOMO" C0402 412.973,336.61 r180 bottom value=100nF
C1229 "C-NOMO" C0402 408.08,328.271 r180 bottom value=2.2uF
C1230 "C-NOMO" C0603 418.297,320.832 r90 top value=1uF
C1231 "C-NOMO" C0402 416.105,323.421 r270 bottom value=100nF
C1232 "C-NOMO" C0805 421.032,320.607 r90 top value=10uF
C1233 "C-NOMO" C0402 416.931,323.421 r270 bottom value=100nF
C1300 "C-NOMO" C0402 415.28,323.421 r90 bottom value=100nF
C1301 "C-NOMO" C0402 411.616,327.611 r270 bottom value=100nF
C1302 "C-NOMO" C0402 411.61,329.394 r90 bottom value=100nF
C1303 "C-NOMO" C0402 412.97,321.349 r0 top value=100nF
C1304 "C-NOMO" C0402 407.976,321.398 r0 top value=100nF
C1305 "C-NOMO" C0402 425.654,315.922 r0 top value=100nF
D200 "SMAJ33CA" SMAJ33CA 390.738,284.977 r90 top
D201 "SMAJ33CA" SMAJ33CA 392.335,292.337 r180 top
D600 "PESD5V0H1BSF" PESD5V0H1BSF 382.551,343.254 r90 top
D700 "PESD5V0H1BSF" PESD5V0H1BSF 437.708,321.783 r180 top
D701 "PESD5V0H1BSF" PESD5V0H1BSF 438.687,316.834 r180 top
D900 "SMF15CA" SMF15CA 424.158,284.528 r90 bottom
D901 "SMF15CA" SMF15CA 418.163,277.804 r270 bottom
D902 "SMF15CA" SMF15CA 424.123,298.097 r90 bottom
D903 "SMF15CA" SMF15CA 418.163,291.403 r270 bottom
D904 "SMF15CA" SMF15CA 424.158,311.848 r90 bottom
D905 "SMF15CA" SMF15CA 418.163,305.129 r270 bottom
J200 "XT60PW-M" XT60PW-M 382.185,295.273 r90 top
J600 "AFC01-S40FCA-00" AFC01-S40FCA-00 379.882,331.901 r270 top
J700 "AFC01-S40FCA-00" AFC01-S40FCA-00 441.135,331.706 r90 top
J900 "LCC40PW-M" LCC40PW-M 443.189,297.444 r270 top
J1000 "MOLEX-532610571" MOLEX-532610571 442.457,297.412 r90 bottom
L200 "L" FXL0420 398.918,310.515 r90 top value=2.2uH
L201 "L" FXL0420 389.887,310.706 r90 top value=2.2uH
L202 "BLM15PD121SN1D" L0402 461.899,274.701 r90 top value=120R@100MHz
MARKPOINT1400 "MARKPOINT" MARKPOINT-1.0#1 385.789,350.954 r90 top
MARKPOINT1401 "MARKPOINT" MARKPOINT-1.0#1 434.901,276.258 r90 top
MARKPOINT1402 "MARKPOINT" MARKPOINT-1.0#2 385.491,276.258 r90 bottom
MARKPOINT1403 "MARKPOINT" MARKPOINT-1.0#2 434.901,350.954 r90 bottom
POSHOLE1400 "POSHOLE" POSHOLE-3.2 440.596,278.765 r90 top
POSHOLE1401 "POSHOLE" POSHOLE-3.2 380.596,278.765 r90 top locked
POSHOLE1402 "POSHOLE" POSHOLE-3.2 440.596,348.765 r90 top
POSHOLE1403 "POSHOLE" POSHOLE-3.2 380.596,348.765 r90 top locked
Q200 "CSD18534Q5A" CSD18534Q5A 392.235,297.859 r270 top
Q201 "IAUC100N04S6N022" IAUC100N04S6N022 397.439,285.145 r0 top
Q700 "SK2301AAT" SK2301AAT 435.453,318.407 r180 top
Q900 "IAUC100N04S6N022" IAUC100N04S6N022 421.163,284.149 r180 top
Q901 "IAUC100N04S6N022" IAUC100N04S6N022 421.158,278.183 r0 top
Q902 "IAUC100N04S6N022" IAUC100N04S6N022 421.163,297.745 r180 top
Q903 "IAUC100N04S6N022" IAUC100N04S6N022 421.158,291.782 r0 top
Q904 "IAUC100N04S6N022" IAUC100N04S6N022 421.163,311.468 r180 top
Q905 "IAUC100N04S6N022" IAUC100N04S6N022 421.158,305.509 r0 top
R200 "R" R0402 395.017,307.532 r180 top value=100K
R201 "R" R0603 394.475,304.782 r180 top value=562K
R202 "R" R1206 410.387,281.414 r90 top value=0R
R203 "R" R0603 394.475,306.19 r0 top value=180K
R204 "R" R0402 385.87,307.662 r180 top value=100K
R205 "R" R0603 385.424,306.32 r180 top value=953K
R206 "R" R0603 385.424,304.912 r0 top value=180K
R207 "R" R0603 447.675,275.336 r90 top value=10R
R400 "R" R0402 401.38,337.33 r90 top value=47K
R401 "R" R0402 400.473,337.33 r270 top value=22R
R402 "R" R0402 400.924,334.425 r0 top value=47K
R403 "R" R0402 400.924,335.436 r180 top value=22R
R404 "R" R0402 399.11,334.425 r180 top value=47K
R405 "R" R0402 399.11,335.436 r0 top value=22R
R406 "R" R0402 401.38,340.949 r270 top value=47K
R407 "R" R0402 400.473,340.949 r90 top value=22R
R408 "R" R0402 401.38,339.14 r90 top value=47K
R409 "R" R0402 400.473,339.14 r270 top value=22R
R410 "R" R0402 401.38,342.759 r90 top value=47K
R411 "R" R0402 400.473,342.759 r90 top value=22R
R412 "R" R0402 397.296,334.425 r180 top value=47K
R413 "R" R0402 397.296,335.436 r0 top value=22R
R414 "R" R0402 395.482,334.425 r0 top value=47K
R415 "R" R0402 395.482,335.436 r0 top value=22R
R416 "R" R0402 401.38,346.378 r270 top value=10K
R417 "R" R0402 400.473,346.378 r90 top value=22R
R418 "R" R0402 400.473,348.187 r90 top value=22R
R419 "R" R0402 395.169,343.178 r90 bottom value=47K
R420 "R" R0402 401.38,344.568 r270 top value=47K
R421 "R" R0402 400.473,344.568 r90 top value=0R
R500 "R" R0402 392.899,332.96 r0 top value=10K
R501 "R" R0402 395.188,321.955 r0 top value=33R
R502 "R" R0402 388.248,321.955 r0 top value=33R
R503 "R" R0402 397.442,332.96 r0 top value=33R
R504 "R" R0402 390.627,332.96 r0 top value=33R
R505 "R" R0402 395.17,332.96 r0 top value=33R
R506 "R" R0402 388.356,332.96 r0 top value=33R
R507 "R" R0402 397.501,321.955 r0 top value=33R
R508 "R" R0402 390.561,321.955 r0 top value=33R
R600 "R" R0402 385.965,325.202 r90 top value=1K
R601 "R" R0402 385.965,323.468 r90 top value=100R
R602 "R" R0402 385.965,321.735 r270 top value=100R
R700 "R" R0402 438.133,318.686 r0 top value=47K
R701 "R" R0402 434.863,322.681 r90 top value=33R
R702 "R" R0402 429.559,322.414 r0 top value=33R
R703 "R" R0402 438.133,317.746 r0 top value=33R
R704 "R" R0402 429.559,324.286 r0 top value=33R
R705 "R" R0402 433.447,326.157 r0 top value=33R
R706 "R" R0402 434.889,316.766 r0 top value=33R
R707 "R" R0402 433.447,327.122 r0 top value=33R
R708 "R" R0402 433.447,328.086 r0 top value=33R
R709 "R" R0402 433.447,329.051 r0 top value=33R
R710 "R" R0402 433.447,330.016 r0 top value=33R
R711 "R" R0402 433.447,330.98 r0 top value=33R
R712 "R" R0402 429.023,317.65 r180 top value=10K
R713 "R" R0402 433.41,339.591 r180 top value=33R
R714 "R" R0402 433.41,340.492 r180 top value=33R
R715 "R" R0402 428.154,340.276 r270 top value=33R
R800 "R" R0402 467.005,309.196 r180 top value=10K
R801 "R" R0402 467.005,310.139 r0 top value=1.5K
R802 "R" R0402 420.759,263.096 r180 top value=10K
R803 "R" R0402 420.759,263.922 r0 top value=1.5K
R804 "R" R0402 471.569,310.578 r270 top value=9.1K
R805 "R" R0402 420.759,265.688 r180 top value=9.1K
R806 "R" R0402 467.005,311.884 r180 top value=6.2K
R807 "R" R0402 424.048,264.331 r270 top value=6.2K
R808 "R" R0402 409.495,263.174 r180 top value=10K
R809 "R" R0402 409.495,264.045 r180 top value=1.5K
R810 "R" R0402 397.96,263.183 r180 top value=10K
R811 "R" R0402 397.96,264.064 r180 top value=1.5K
R812 "R" R0402 409.495,265.786 r180 top value=9.1K
R813 "R" R0402 397.96,265.827 r180 top value=9.1K
R814 "R" R0402 412.115,264.514 r270 top value=6.2K
R815 "R" R0402 400.722,264.548 r270 top value=6.2K
R900 "R" R0805 423.087,287.97 r0 top value=0R5
R901 "R" R0603 426.051,285.334 r90 bottom value=100K
R902 "R" R0402 404.855,302.494 r270 top value=10K
R903 "R" R0402 403.992,302.494 r270 top value=10K
R904 "R" R0402 403.128,302.494 r270 top value=10K
R905 "R" R0402 405.719,302.494 r270 top value=10K
R906 "R" R0805 414.386,276.337 r0 top value=0R5
R907 "R" R0603 416.316,276.905 r270 bottom value=100K
R908 "R" R0402 409.174,302.494 r270 top value=33R
R909 "R" R0805 423.087,301.561 r0 top value=0R5
R910 "R" R0603 426.051,298.973 r90 bottom value=100K
R911 "R" R0402 406.583,302.494 r270 top value=33R
R912 "R" R0402 407.446,302.494 r270 top value=33R
R913 "R" R0402 408.31,302.494 r270 top value=33R
R914 "R" R0805 418.982,287.97 r180 top value=0R5
R915 "R" R0603 416.316,290.504 r270 bottom value=100K
R916 "R" R0402 410.037,302.494 r270 top value=33R
R917 "R" R0402 410.901,302.494 r270 top value=33R
R918 "R" R2512 414.529,281.148 r270 top value=0R005
R919 "R" R0402 411.765,302.494 r270 top value=33R
R920 "R" R0805 426.997,313.261 r180 top value=0R5
R921 "R" R0603 411.203,313.863 r270 top value=47K
R922 "R" R0603 426.051,312.74 r90 bottom value=100K
R923 "R" R0603 409.7,313.863 r270 top value=6.8K
R924 "R" R0805 418.982,301.561 r0 top value=0R5
R925 "R" R0603 416.316,304.229 r270 bottom value=100K
R926 "R" R2512 414.529,294.59 r270 top value=0R005
R927 "R" R2512 414.529,308.16 r270 top value=0R005
R1000 "R" R0402 429.023,320.35 r0 top value=33R
R1001 "R" R0402 438.57,300.991 r180 bottom value=33R
R1002 "R" R0402 429.023,319.45 r0 top value=33R
R1003 "R" R0402 436.956,301.106 r270 bottom value=33R
R1004 "R" R0402 429.023,318.55 r0 top value=33R
R1005 "R" R0402 436.953,299.179 r270 bottom value=33R
R1200 "R" R0603 419.517,320.857 r270 top value=0R
R1300 "R" R0402 409.861,340.632 r90 top value=33R
R1301 "R" R0402 422.667,341.956 r180 top value=33R
R1302 "R" R0402 403.876,342.355 r180 top value=33R
R1303 "R" R0402 411.009,340.632 r90 top value=33R
R1304 "R" R0402 422.667,342.851 r180 top value=33R
R1305 "R" R0402 403.876,340.567 r180 top value=33R
R1306 "R" R0402 403.876,341.461 r180 top value=33R
R1307 "R" R0402 403.876,339.674 r180 top value=33R
R1308 "R" R0402 423.934,325.564 r0 top value=33R
R1309 "R" R0402 414.451,340.632 r90 top value=33R
R1310 "R" R0402 405.386,325.821 r180 top value=33R
R1311 "R" R0402 423.934,324.673 r0 top value=33R
R1312 "R" R0402 413.304,340.632 r90 top value=33R
R1313 "R" R0402 405.386,324.917 r180 top value=33R
R1314 "R" R0402 402.643,324.917 r180 top value=33R
R1315 "R" R0402 423.934,326.454 r0 top value=33R
R1316 "R" R0402 402.643,325.821 r180 top value=33R
R1317 "R" R0402 424.124,342.399 r90 top value=33R
R1318 "R" R0402 412.156,340.632 r90 top value=33R
R1319 "R" R0402 405.167,314.147 r270 top value=33R
R1320 "R" R0402 424.124,344.187 r90 top value=33R
R1321 "R" R0402 402.619,330.266 r180 top value=33R
R1322 "R" R0402 402.643,326.725 r180 top value=33R
R1323 "R" R0402 404.265,314.147 r270 top value=33R
R1324 "R" R0402 422.667,343.746 r180 top value=33R
R1325 "R" R0402 402.643,327.629 r180 top value=33R
R1326 "R" R0402 403.364,314.147 r270 top value=33R
R1327 "R" R0402 428.153,336.681 r90 top value=33R
R1328 "R" R0402 429.559,323.35 r180 top value=33R
R1329 "R" R0402 424.124,340.61 r90 top value=33R
R1330 "R" R0402 402.634,329.172 r180 top value=33R
R1331 "R" R0402 424.124,338.822 r90 top value=33R
R1332 "R" R0402 405.386,327.629 r180 top value=33R
R1333 "R" R0402 405.386,326.725 r180 top value=33R
R1334 "R" R0402 404.688,321.141 r270 top value=33R
R1335 "R" R0402 415.599,340.632 r90 top value=33R
R1336 "R" R0402 405.616,321.178 r270 top value=33R
R1337 "R" R0402 428.131,325.03 r90 top value=33R
R1338 "R" R0402 429.023,321.25 r0 top value=33R
R1339 "R" R0402 428.131,326.835 r90 top value=33R
R1340 "R" R0402 428.131,328.64 r90 top value=33R
R1341 "R" R0402 422.667,348.699 r180 top value=33R
R1342 "R" R0402 428.131,330.446 r270 top value=33R
R1343 "R" R0402 422.667,347.792 r180 top value=33R
R1344 "R" R0402 428.131,332.251 r270 top value=33R
R1345 "R" R0402 405.591,344.3 r0 top value=33R
R1346 "R" R0402 423.523,329.208 r90 top value=33R
R1347 "R" R0402 405.591,343.413 r0 top value=33R
R1348 "R" R0402 423.523,331.012 r90 top value=33R
R1349 "R" R0402 405.591,346.074 r0 top value=33R
R1350 "R" R0402 423.523,332.815 r90 top value=33R
R1351 "R" R0402 405.591,349.621 r0 top value=33R
R1352 "R" R0402 423.523,336.423 r90 top value=33R
R1353 "R" R0402 405.591,346.96 r0 top value=33R
R1354 "R" R0402 423.523,334.619 r90 top value=33R
R1355 "R" R0402 405.591,348.734 r0 top value=33R
R1356 "R" R0402 424.514,334.602 r90 top value=33R
R1357 "R" R0402 405.591,345.187 r0 top value=33R
R1358 "R" R0402 424.514,332.803 r90 top value=33R
R1359 "R" R0402 405.591,347.847 r0 top value=33R
R1360 "R" R0402 424.514,331.003 r90 top value=33R
R1361 "R" R0402 424.514,336.402 r90 top value=33R
R1362 "R" R0402 422.667,344.642 r180 top value=33R
R1363 "R" R0402 405.386,332.028 r180 top value=33R
R1364 "R" R0402 428.154,338.48 r90 top value=33R
R1365 "R" R0402 405.386,332.933 r180 top value=33R
R1366 "R" R0402 405.386,333.838 r180 top value=33R
R1367 "R" R0402 405.386,331.123 r180 top value=33R
R1368 "R" R0402 405.386,329.312 r180 top value=33R
R1369 "R" R0402 405.386,330.218 r180 top value=33R
R1370 "R" R0402 404.702,319.416 r270 top value=33R
R1371 "R" R0402 403.8,319.416 r270 top value=33R
R1372 "R" R0402 429.023,316.75 r180 top value=10K
R1373 "R" R0402 402.899,319.416 r270 top value=33R
R1374 "R" R0402 402.885,321.141 r270 top value=33R
R1375 "R" R0402 403.787,321.141 r270 top value=33R
R1376 "R" R0402 414.822,321.314 r0 top value=51R
R1377 "R" R0402 402.601,331.238 r180 top value=33R
R1378 "R" R0402 422.667,346.885 r180 top value=33R
R1379 "R" R0402 422.667,340.165 r180 top value=33R
R1380 "R" R0402 422.667,338.375 r180 top value=33R
R1381 "R" R0402 409.786,321.363 r180 top value=51R
R1382 "R" R0402 422.667,339.27 r180 top value=33R
R1383 "R" R0402 428.55,335.287 r180 top value=10K
R1384 "R" R0402 422.667,341.061 r180 top value=33R
R1385 "R" R0402 428.55,334.293 r0 top value=10K
R1386 "R" R0402 412.125,319.934 r270 top value=10K
R1387 "R" R0402 407.02,320.03 r270 top value=10K
RT800 "NCP15XH103F03RC" NTC0402 472.498,310.678 r90 top value="10K 3380"
RT801 "NCP15XH103F03RC" NTC0402 425.007,264.43 r90 top value="10K 3380"
RT802 "NCP15XH103F03RC" NTC0402 413.173,264.613 r90 top value="10K 3380"
RT803 "NCP15XH103F03RC" NTC0402 401.709,264.647 r90 top value="10K 3380"
U200 "TPS62130RGTR" TPS62130RGTR 398.07,305.705 r270 top
U201 "LM74700QDBVR-Q1" LM74700QDBVR-Q1 397.598,297.332 r180 top
U202 "TPS62130RGTR" TPS62130RGTR 389.249,305.835 r270 top
U203 "LM74700QDBVR-Q1" LM74700QDBVR-Q1 397.869,279.794 r90 top
U300 "IS42S32800J-6BLI" IS42S32800J-6BLI 413.912,346.242 r90 top
U400 "KLMAG2GEND-B031" KLMAG2GEND-B031 393.468,343.742 r180 top
U500 "MX25L25645GZ2I-08G" MX25L25645GZ2I-08G 397.596,327.5 r270 top
U501 "MX25L25645GZ2I-08G" MX25L25645GZ2I-08G 390.557,327.405 r270 top
U600 "TPESD8004MUTAG" TPESD8004MUTAG 384.242,342.528 r0 top
U601 "TPESD8004MUTAG" TPESD8004MUTAG 384.242,339.774 r0 top
U602 "TPESD8004MUTAG" TPESD8004MUTAG 384.242,337.019 r0 top
U603 "TPESD8004MUTAG" TPESD8004MUTAG 384.242,334.265 r0 top
U604 "TPESD8004MUTAG" TPESD8004MUTAG 384.242,331.51 r0 top
U605 "TPESD8004MUTAG" TPESD8004MUTAG 384.242,328.756 r0 top
U606 "TPESD8004MUTAG" TPESD8004MUTAG 384.242,326.002 r0 top
U607 "TPESD8004MUTAG" TPESD8004MUTAG 384.242,323.247 r0 top
U700 "SN74AXC2T245RSWR" SN74AXC2T245RSWR 432.273,320.586 r90 top
U701 "SN74LVC1G14DRYR" SN74LVC1G14DRYR 436.283,320.672 r180 top
U702 "TXB0101DCKR" TXB0101DCKR 432.436,324.253 r0 top
U703 "SN74AXC1T45DEAR" SN74AXC1T45DEAR 436.582,316.175 r180 top
U704 "TXV0106BQBR" TXV0106BQBR 430.604,329.143 r180 top
U705 "74LVC2G17GM,115" 74LVC2G17GM,115 431.253,334.835 r180 top
U706 "74LVC2G17GM,115" 74LVC2G17GM,115 429.476,332.559 r0 top
U707 "SN74AXC4T774RSVR" SN74AXC4T774RSVR 429.65,342.938 r0 top
U708 "74LVC2G17GM,115" 74LVC2G17GM,115 430.434,336.945 r180 top
U709 "74LVC2G17GM,115" 74LVC2G17GM,115 432.583,332.59 r0 top
U710 "TPESD8004MUTAG" TPESD8004MUTAG 436.816,324.307 r180 top
U711 "TPESD8004MUTAG" TPESD8004MUTAG 436.816,327.069 r180 top
U712 "TXS0102DQER" TXS0102DQER 433.216,334.86 r0 top
U713 "SN74AXC4T774RSVR" SN74AXC4T774RSVR 433.059,342.938 r0 top
U714 "SN74AVC4T245RSVR" SN74AVC4T245RSVR 430.487,339.476 r90 top
U715 "TPESD8004MUTAG" TPESD8004MUTAG 436.816,329.831 r180 top
U716 "TPESD8004MUTAG" TPESD8004MUTAG 436.816,332.594 r180 top
U717 "TPESD8004MUTAG" TPESD8004MUTAG 436.816,335.356 r180 top
U718 "TPESD8004MUTAG" TPESD8004MUTAG 436.816,338.119 r180 top
U719 "TPESD8004MUTAG" TPESD8004MUTAG 436.816,340.881 r180 top
U720 "TPESD8004MUTAG" TPESD8004MUTAG 436.816,343.643 r180 top
U800 "TLV9061IDBVR" TLV9061IDBVR 463.982,310.532 r0 top
U801 "TLV9061IDBVR" TLV9061IDBVR 417.754,264.407 r0 top
U802 "TLV9061IDBVR" TLV9061IDBVR 406.427,264.407 r0 top
U803 "TLV9061IDBVR" TLV9061IDBVR 394.923,264.521 r0 top
U900 "DRV8323RSRGZR" DRV8323RSRGZR 407.598,294.998 r90 top
U901 "TPESD8004MUTAG" TPESD8004MUTAG 410.313,300.156 r270 top
U902 "TPESD8004MUTAG" TPESD8004MUTAG 407.494,300.156 r270 top
U903 "TPESD8004MUTAG" TPESD8004MUTAG 404.675,300.156 r270 top
U904 "TPESD8004MUTAG" TPESD8004MUTAG 401.921,297.459 r0 top
U905 "TPESD8004MUTAG" TPESD8004MUTAG 401.921,294.645 r0 top
U1000 "SN74AVC4T245RSVR" SN74AVC4T245RSVR 431.421,317.3 r180 top
U1001 "TPESD8004MUTAG" TPESD8004MUTAG 438.551,298.969 r180 bottom
U1200 "STM32H750XBH6" STM32H750XBH6 414.48,329.821 r90 top
U1301 "SN74LVC1G08DCKR" SN74LVC1G08DCKR 426.282,317.656 r180 top
Y1300 "OT252025MJBA4SL" OT252025MJBA4SL 414.166,319.526 r0 top value=25MHz
Y1301 "OK252032768KJBA4SL" OK252032768KJBA4SL 408.916,319.604 r0 top value=32.768KHz

## Footprints (in the part's own frame and the unit in brackets; to place one, negate y for a bottom-side part, rotate by r counter-clockwise, add the part's x,y. Pads: shape width x height; smd on the part's side, far side on the other; paste and mask are expansions set on the pad)
74LVC2G17GM,115 [mm] "PSON, 6-Leads, Body 1.45x1.00mm, Pitch 0.60mm, IPC Medium Density"
  rrect50% 0.4x0.25 smd: 1(-0.275,0.6)
  rrect50% 0.35x0.25 smd: 2(-0.3,0) 3(-0.3,-0.6) 4(0.3,-0.6) 5(0.3,0) 6(0.3,0.6)
  silkscreen extent -0.43,0.99 -0.12,0.99, body extent -0.53,-0.75 0.53,0.75, height 0.5
AFC01-S40FCA-00 [mm]
  rect 0.3x1.3 smd: 1(-9.75,1.34) 2(-9.25,1.34) 3(-8.75,1.34) 4(-8.25,1.34) 5(-7.75,1.34) 6(-7.25,1.34) 7(-6.75,1.34) 8(-6.25,1.34) 9(-5.75,1.34) 10(-5.25,1.34) 11(-4.75,1.34) 12(-4.25,1.34) 13(-3.75,1.34) 14(-3.25,1.34) 15(-2.75,1.34) 16(-2.25,1.34) 17(-1.75,1.34) 18(-1.25,1.34) 19(-0.75,1.34) 20(-0.25,1.34) 21(0.25,1.34) 22(0.75,1.34) 23(1.25,1.34) 24(1.75,1.34) 25(2.25,1.34) 26(2.75,1.34) 27(3.25,1.34) 28(3.75,1.34) 29(4.25,1.34) 30(4.75,1.34) 31(5.25,1.34) 32(5.75,1.34) 33(6.25,1.34) 34(6.75,1.34) 35(7.25,1.34) 36(7.75,1.34) 37(8.25,1.34) 38(8.75,1.34) 39(9.25,1.34) 40(9.75,1.34)
  rect 2x1.6 smd: ""(-11.463,-1.34) ""(11.463,-1.34)
  silkscreen extent -10,-0.02 -9.5,0.49, body extent -12.15,-4.32 12.15,1.53, height 2.11
C0402 [mm] "Chip Capacitor, 2-Leads, Body 1.00x0.50mm, IPC Medium Density"
  rect 0.58x0.62 smd: 1(-0.48,0) 2(0.48,0)
  body extent -0.53,-0.28 0.53,0.28, height 0.55
C0603 [mm] "Chip Capacitor, 2-Leads, Body 1.60x0.80mm, IPC Medium Density"
  rect 0.8x0.95 smd: 1(-0.825,0) 2(0.825,0)
  body extent -0.85,-0.45 0.85,0.45, height 0.9
C0805 [mm] "Chip Capacitor, 2-Leads, Body 2.00x1.25mm, IPC Medium Density"
  rect 1.05x1.45 smd: 1(-0.925,0) 2(0.925,0)
  body extent -1.1,-0.72 1.1,0.72, height 1.45
CSD18534Q5A [mm]
  rect 0.75x0.65 smd paste-2539.97: 1(2.777,-1.93) 2(2.777,-0.643) 3(2.777,0.643) 4(2.777,1.93)
  rect 0.655x0.65 smd paste-2539.97: 5(-2.777,1.93) 6(-2.777,0.643) 7(-2.777,-0.643) 8(-2.777,-1.93)
  rect 4.295x4.51 smd paste-2539.97: ""(-0.314,0)
  body extent -3,-2.55 3,2.55, height 1.05
DRV8323RSRGZR [mm] "PQFN, 48-Leads, Body 7.00x7.00mm, Pitch 0.50mm, Thermal Pad 5.15x5.15mm, IPC Medium Density"
  rrect50% 0.55x0.35 smd: 1(-3.275,2.75) 2(-3.275,2.25) 3(-3.275,1.75) 4(-3.275,1.25) 5(-3.275,0.75) 6(-3.275,0.25) 7(-3.275,-0.25) 8(-3.275,-0.75) 9(-3.275,-1.25) 10(-3.275,-1.75) 11(-3.275,-2.25) 12(-3.275,-2.75) 25(3.275,-2.75) 26(3.275,-2.25) 27(3.275,-1.75) 28(3.275,-1.25) 29(3.275,-0.75) 30(3.275,-0.25) 31(3.275,0.25) 32(3.275,0.75) 33(3.275,1.25) 34(3.275,1.75) 35(3.275,2.25) 36(3.275,2.75)
  rrect50% 0.35x0.55 smd: 13(-2.75,-3.275) 14(-2.25,-3.275) 15(-1.75,-3.275) 16(-1.25,-3.275) 17(-0.75,-3.275) 18(-0.25,-3.275) 19(0.25,-3.275) 20(0.75,-3.275) 21(1.25,-3.275) 22(1.75,-3.275) 23(2.25,-3.275) 24(2.75,-3.275) 37(2.75,3.275) 38(2.25,3.275) 39(1.75,3.275) 40(1.25,3.275) 41(0.75,3.275) 42(0.25,3.275) 43(-0.25,3.275) 44(-0.75,3.275) 45(-1.25,3.275) 46(-1.75,3.275) 47(-2.25,3.275) 48(-2.75,3.275)
  rrect5% 5.15x5.15 smd paste-2539.97: 49(0,0)
  silkscreen extent -3.55,-3.55 3.55,3.55, body extent -3.55,-3.55 3.55,3.55, height 1
FXL0420 [mm]
  rrect10% 1.5x2.5 smd: 1(-1.85,0) 2(1.85,0)
  body extent -2.29,-2.11 2.27,2.09, height 1.85
IAUC100N04S6N022 [mm]
  rect 1.55x0.6 smd paste-1.55 mask+0: 1(-2.995,1.905) 1(-2.995,1.905) 1(-2.995,1.905) 2(-2.995,0.635) 2(-2.995,0.635) 2(-2.995,0.635) 3(-2.995,-0.635) 3(-2.995,-0.635) 3(-2.995,-0.635) 4(-2.995,-1.905) 4(-2.995,-1.905) 4(-2.995,-1.905)
  rect 1.55x0.6 smd paste-1.35 mask+0: 5(3.1,-1.905) 5(3.1,-1.905) 5(3.1,-1.905) 6(3.1,-0.635) 6(3.1,-0.635) 6(3.1,-0.635) 7(3.1,0.635) 7(3.1,0.635) 7(3.1,0.635) 8(3.1,1.905) 8(3.1,1.905) 8(3.1,1.905)
  SIG1 region: 3.775,2.205 3.775,-2.205 -1.125,-2.205 -1.125,2.205
  SIG1 region: -2.22,2.205 -2.22,-0.935 -3.77,-0.935 -3.77,2.205 -2.995,2.205
  silkscreen extent -2.02,1.65 -1.51,2.16, body extent -3.22,-2.71 3.22,2.7, height 1.01
IS42S32800J-6BLI [mm] "BGA, 90-Leads, Body 8.00x13.00mmx1.20mm, Pitch 0.80mm"
  round 0.36 smd: A1(-3.2,5.6) A2(-2.4,5.6) A3(-1.6,5.6) A7(1.6,5.6) A8(2.4,5.6) A9(3.2,5.6) B1(-3.2,4.8) B2(-2.4,4.8) B3(-1.6,4.8) B7(1.6,4.8) B8(2.4,4.8) B9(3.2,4.8) C1(-3.2,4) C2(-2.4,4) C3(-1.6,4) C7(1.6,4) C8(2.4,4) C9(3.2,4) D1(-3.2,3.2) D2(-2.4,3.2) D3(-1.6,3.2) D7(1.6,3.2) D8(2.4,3.2) D9(3.2,3.2) E1(-3.2,2.4) E2(-2.4,2.4) E3(-1.6,2.4) E7(1.6,2.4) E8(2.4,2.4) E9(3.2,2.4) F1(-3.2,1.6) F2(-2.4,1.6) F3(-1.6,1.6) F7(1.6,1.6) F8(2.4,1.6) F9(3.2,1.6) G1(-3.2,0.8) G2(-2.4,0.8) G3(-1.6,0.8) G7(1.6,0.8) G8(2.4,0.8) G9(3.2,0.8) H1(-3.2,0) H2(-2.4,0) H3(-1.6,0) H7(1.6,0) H8(2.4,0) H9(3.2,0) J1(-3.2,-0.8) J2(-2.4,-0.8) J3(-1.6,-0.8) J7(1.6,-0.8) J8(2.4,-0.8) J9(3.2,-0.8) K1(-3.2,-1.6) K2(-2.4,-1.6) K3(-1.6,-1.6) K7(1.6,-1.6) K8(2.4,-1.6) K9(3.2,-1.6) L1(-3.2,-2.4) L2(-2.4,-2.4) L3(-1.6,-2.4) L7(1.6,-2.4) L8(2.4,-2.4) L9(3.2,-2.4) M1(-3.2,-3.2) M2(-2.4,-3.2) M3(-1.6,-3.2) M7(1.6,-3.2) M8(2.4,-3.2) M9(3.2,-3.2) N1(-3.2,-4) N2(-2.4,-4) N3(-1.6,-4) N7(1.6,-4) N8(2.4,-4) N9(3.2,-4) P1(-3.2,-4.8) P2(-2.4,-4.8) P3(-1.6,-4.8) P7(1.6,-4.8) P8(2.4,-4.8) P9(3.2,-4.8) R1(-3.2,-5.6) R2(-2.4,-5.6) R3(-1.6,-5.6) R7(1.6,-5.6) R8(2.4,-5.6) R9(3.2,-5.6)
  silkscreen extent -4,-6.5 4,6.5, body extent -4,-6.5 4,6.5, height 1.2
KLMAG2GEND-B031 [mm] "BGA, 153-Leads, Body 11.50x13.00mmx1.00mm, Pitch 0.50mm"
  round 0.25 smd: A1(-3.25,3.25) A2(-2.75,3.25) A3(-2.25,3.25) A4(-1.75,3.25) A5(-1.25,3.25) A6(-0.75,3.25) A7(-0.25,3.25) A8(0.25,3.25) A9(0.75,3.25) A10(1.25,3.25) A11(1.75,3.25) A12(2.25,3.25) A13(2.75,3.25) A14(3.25,3.25) B1(-3.25,2.75) B2(-2.75,2.75) B3(-2.25,2.75) B4(-1.75,2.75) B5(-1.25,2.75) B6(-0.75,2.75) B7(-0.25,2.75) B8(0.25,2.75) B9(0.75,2.75) B10(1.25,2.75) B11(1.75,2.75) B12(2.25,2.75) B13(2.75,2.75) B14(3.25,2.75) C1(-3.25,2.25) C2(-2.75,2.25) C3(-2.25,2.25) C4(-1.75,2.25) C5(-1.25,2.25) C6(-0.75,2.25) C7(-0.25,2.25) C8(0.25,2.25) C9(0.75,2.25) C10(1.25,2.25) C11(1.75,2.25) C12(2.25,2.25) C13(2.75,2.25) C14(3.25,2.25) D1(-3.25,1.75) D2(-2.75,1.75) D3(-2.25,1.75) D4(-1.75,1.75) D12(2.25,1.75) D13(2.75,1.75) D14(3.25,1.75) E1(-3.25,1.25) E2(-2.75,1.25) E3(-2.25,1.25) E5(-1.25,1.25) E6(-0.75,1.25) E7(-0.25,1.25) E8(0.25,1.25) E9(0.75,1.25) E10(1.25,1.25) E12(2.25,1.25) E13(2.75,1.25) E14(3.25,1.25) F1(-3.25,0.75) F2(-2.75,0.75) F3(-2.25,0.75) F5(-1.25,0.75) F10(1.25,0.75) F12(2.25,0.75) F13(2.75,0.75) F14(3.25,0.75) G1(-3.25,0.25) G2(-2.75,0.25) G3(-2.25,0.25) G5(-1.25,0.25) G10(1.25,0.25) G12(2.25,0.25) G13(2.75,0.25) G14(3.25,0.25) H1(-3.25,-0.25) H2(-2.75,-0.25) H3(-2.25,-0.25) H5(-1.25,-0.25) H10(1.25,-0.25) H12(2.25,-0.25) H13(2.75,-0.25) H14(3.25,-0.25) J1(-3.25,-0.75) J2(-2.75,-0.75) J3(-2.25,-0.75) J5(-1.25,-0.75) J10(1.25,-0.75) J12(2.25,-0.75) J13(2.75,-0.75) J14(3.25,-0.75) K1(-3.25,-1.25) K2(-2.75,-1.25) K3(-2.25,-1.25) K5(-1.25,-1.25) K6(-0.75,-1.25) K7(-0.25,-1.25) K8(0.25,-1.25) K9(0.75,-1.25) K10(1.25,-1.25) K12(2.25,-1.25) K13(2.75,-1.25) K14(3.25,-1.25) L1(-3.25,-1.75) L2(-2.75,-1.75) L3(-2.25,-1.75) L12(2.25,-1.75) L13(2.75,-1.75) L14(3.25,-1.75) M1(-3.25,-2.25) M2(-2.75,-2.25) M3(-2.25,-2.25) M4(-1.75,-2.25) M5(-1.25,-2.25) M6(-0.75,-2.25) M7(-0.25,-2.25) M8(0.25,-2.25) M9(0.75,-2.25) M10(1.25,-2.25) M11(1.75,-2.25) M12(2.25,-2.25) M13(2.75,-2.25) M14(3.25,-2.25) N1(-3.25,-2.75) N2(-2.75,-2.75) N3(-2.25,-2.75) N4(-1.75,-2.75) N5(-1.25,-2.75) N6(-0.75,-2.75) N7(-0.25,-2.75) N8(0.25,-2.75) N9(0.75,-2.75) N10(1.25,-2.75) N11(1.75,-2.75) N12(2.25,-2.75) N13(2.75,-2.75) N14(3.25,-2.75) P1(-3.25,-3.25) P2(-2.75,-3.25) P3(-2.25,-3.25) P4(-1.75,-3.25) P5(-1.25,-3.25) P6(-0.75,-3.25) P7(-0.25,-3.25) P8(0.25,-3.25) P9(0.75,-3.25) P10(1.25,-3.25) P11(1.75,-3.25) P12(2.25,-3.25) P13(2.75,-3.25) P14(3.25,-3.25)
  silkscreen extent -5.75,-6.5 5.75,6.5, body extent -5.75,-6.5 5.75,6.5, height 1
L0402 [mm] "Chip Inductor, 2-Leads, Body 1.00x0.50mm, IPC Medium Density"
  rect 0.56x0.62 smd: 1(-0.47,0) 2(0.47,0)
  body extent -0.53,-0.28 0.53,0.28, height 0.55
LCC40PW-M [mm]
  round 6 hole 4.4 unplated: 1(-8.8,-11.079) 2(0,-11.079) 3(8.8,-11.079)
  round 2.5 hole 1.6 unplated: ""(-12.8,-1.329) ""(12.8,-1.329)
  body extent -14.23,-14.45 14.23,14.45, height 13.55
LM74700QDBVR-Q1 [mm] "SOT23, 6-Leads, Body 2.90x2.80mm, Pitch 0.95mm, IPC Medium Density"
  rrect50% 1.1x0.6 smd: 1(-1.3,0.95) 2(-1.3,0) 3(-1.3,-0.95) 4(1.3,-0.95) 5(1.3,0) 6(1.3,0.95)
  silkscreen extent -0.56,0.7 -0.05,1.2, body extent -1.5,-1.53 1.5,1.53, height 1.45
MARKPOINT-1.0#1 [mm]
  round 1 smd: ""(0,0)
  round 3 on Top Solder: ""(0,0)
  SIG1 pour cut-out: 0,-1.494 -0.572,-1.38 -1.056,-1.056 -1.38,-0.572 -1.494,0 -1.494,0 -1.38,0.572 -1.056,1.056 -0.572,1.38 0,1.494 0,1.494 0.572,1.38 1.056,1.056 1.38,0.572 1.494,0 1.494,0 1.38,-0.572 1.056,-1.056 0.572,-1.38 0,-1.494
MARKPOINT-1.0#2 [mm]
  round 1 smd: ""(0,0)
  round 3 on Bottom Solder: ""(0,0)
  SIG1 pour cut-out: 0,-1.494 -0.572,-1.38 -1.056,-1.056 -1.38,-0.572 -1.494,0 -1.494,0 -1.38,0.572 -1.056,1.056 -0.572,1.38 0,1.494 0,1.494 0.572,1.38 1.056,1.056 1.38,0.572 1.494,0 1.494,0 1.38,-0.572 1.056,-1.056 0.572,-1.38 0,-1.494
MOLEX-532610571 [mm]
  rrect50% 0.8x1.6 smd: 1(2.5,-1.45) 2(1.25,-1.45) 3(0,-1.45) 4(-1.25,-1.45) 5(-2.5,-1.45)
  rrect20% 2.1x3 smd: PAD(-5.023,1.45) PAD(5.023,1.45)
  body extent -5.55,-2 5.55,3.2, height 3.4
MX25L25645GZ2I-08G [mm] "SON, 8-Leads, Body 6.00x8.00mm, Pitch 1.27mm, Thermal Pad 4.60x4.70mm, IPC Medium Density"
  rrect50% 0.95x0.45 smd: 1(-3.87,1.905) 2(-3.87,0.635) 3(-3.87,-0.635) 4(-3.87,-1.905) 5(3.87,-1.905) 6(3.87,-0.635) 7(3.87,0.635) 8(3.87,1.905)
  rrect5% 4.7x4.6 smd paste-2.35: 9(0,0)
  silkscreen extent -3.19,1.65 -2.69,2.16, body extent -4.1,-3.05 4.1,3.05, height 0.8
NTC0402 [mm] "Chip Resistor, 2-Leads, Body 1.00x0.50mm, IPC Medium Density"
  rect 0.4x0.5 smd: 1(-0.451,0) 2(0.451,0)
  body extent -0.53,-0.28 0.53,0.28, height 0.55
OK252032768KJBA4SL [mm]
  rrect50% 0.9x0.8 smd: 1(-0.925,-0.725) 2(0.925,-0.725) 3(0.925,0.725) 4(-0.925,0.725)
  silkscreen extent -0.27,-0.98 0.23,-0.47, body extent -1.25,-1 1.25,1, height 0.8
OT252025MJBA4SL [mm]
  rrect50% 0.9x0.8 smd: 1(-0.925,-0.725) 2(0.925,-0.725) 3(0.925,0.725) 4(-0.925,0.725)
  silkscreen extent -0.27,-0.98 0.23,-0.47, body extent -1.25,-1 1.25,1, height 0.8
PESD5V0H1BSF [mm] "DFN, 2-Leads, Body 0.30x0.60mm, Pitch 0.40mm, IPC Medium Density"
  rect 0.25x0.35 smd: 1(-0.2,0) 2(0.2,0)
  body extent -0.31,-0.16 0.31,0.16, height 0.32
POSHOLE-3.2 [mil] "3.2mm hole"
  round 30 smd: ""(-100,0) ""(-70.71,-70.71) ""(-70.71,70.71) ""(0,100) ""(0,-100) ""(70.71,-70.71) ""(70.71,70.71) ""(100,0)
  round 30 smd far side: ""(-100,0) ""(-70.71,-70.71) ""(-70.71,70.71) ""(0,100) ""(0,-100) ""(70.71,-70.71) ""(70.71,70.71) ""(100,0)
  round 0 hole 125.98 unplated: ""(0,0)
  SIG1 pour cut-out: 0,-125 -47.84,-115.48 -88.39,-88.39 -115.48,-47.84 -125,0 -125,0 -115.48,47.84 -88.39,88.39 -47.84,115.48 0,125 0,125 47.84,115.48 88.39,88.39 115.48,47.84 125,0 125,0 115.48,-47.84 88.39,-88.39 47.84,-115.48 0,-125
  SIG6 pour cut-out: 0,-125 -47.84,-115.48 -88.39,-88.39 -115.48,-47.84 -125,0 -125,0 -115.48,47.84 -88.39,88.39 -47.84,115.48 0,125 0,125 47.84,115.48 88.39,88.39 115.48,47.84 125,0 125,0 115.48,-47.84 88.39,-88.39 47.84,-115.48 0,-125
  silkscreen extent -125,-125 125,125
R0402 [mm] "Chip Resistor, 2-Leads, Body 1.00x0.50mm, IPC Medium Density"
  rect 0.55x0.55 smd: 1(-0.475,0) 2(0.475,0)
  body extent -0.55,-0.28 0.55,0.28, height 0.4
R0603 [mm] "Chip Resistor, 2-Leads, Body 1.60x0.80mm, IPC Medium Density"
  rect 0.75x0.9 smd: 1(-0.825,0) 2(0.825,0)
  body extent -0.85,-0.45 0.85,0.45, height 0.55
R0805 [mm] "Chip Resistor, 2-Leads, Body 2.00x1.27mm, IPC Medium Density"
  rect 0.9x1.4 smd: 1(-0.975,0) 2(0.975,0)
  body extent -1.07,-0.7 1.07,0.7, height 0.65
R1206 [mm] "Chip Resistor, 2-Leads, Body 3.10x1.58mm, IPC Medium Density"
  rect 1.15x1.7 smd: 1(-1.4,0) 2(1.4,0)
  body extent -1.63,-0.85 1.63,0.85, height 0.65
R2512 [mm] "Chip Resistor, 2-Leads, Body 6.35x3.20mm, IPC Medium Density"
  rect 1.15x3.4 smd: 1(-3,0) 2(3,0)
  body extent -3.22,-1.7 3.22,1.7, height 0.65
SK2301AAT [mm] "SOT23, 3-Leads, Body 1.60x1.55mm, Pitch 0.50mm, IPC Medium Density"
  rrect50% 0.75x0.45 smd: D(0.825,0) G(-0.825,0.5) S(-0.825,-0.5)
  body extent -0.82,-0.85 0.82,0.85, height 0.9
SMAJ33CA [mm] "Molded Diode, 2-Leads, Body 5.00x2.67mm, IPC Medium Density"
  rect 2.4x1.6 smd: 1(-1.925,0) 2(1.925,0)
  silkscreen extent -0.53,-0.25 -0.02,0.25, body extent -2.82,-1.4 2.82,1.4, height 2.2
SMF15CA [mm] "SODFL, 2-Leads, Body 1.80x3.73mm, IPC Medium Density"
  rect 1.2x1.2 smd: 1(-1.526,0) 2(1.526,0)
  body extent -1.86,-1 1.86,1, height 1.35
SN74AVC4T245RSVR [mm] "QFN, 16-Leads, Body 1.80x2.60mm, Pitch 0.40mm, IPC Medium Density"
  rrect50% 0.7x0.2 smd: 1(-0.75,0.6)
  rrect50% 0.6x0.2 smd: 2(-0.8,0.2) 3(-0.8,-0.2) 4(-0.8,-0.6) 9(0.8,-0.6) 10(0.8,-0.2) 11(0.8,0.2) 12(0.8,0.6)
  rrect50% 0.2x0.6 smd: 5(-0.6,-1.2) 6(-0.2,-1.2) 7(0.2,-1.2) 8(0.6,-1.2) 13(0.6,1.2) 14(0.2,1.2) 15(-0.2,1.2) 16(-0.6,1.2)
  silkscreen extent -1.12,0.91 -0.89,0.91, body extent -0.97,-1.38 0.97,1.38, height 0.55
SN74AXC1T45DEAR [mm] "PSON, 6-Leads, Body 1.00x1.00mm, Pitch 0.35mm, IPC Medium Density"
  rrect50% 0.36x0.16 smd: 1(-0.25,0.35)
  rrect50% 0.31x0.16 smd: 2(-0.275,0) 3(-0.275,-0.35) 4(0.275,-0.35) 5(0.275,0) 6(0.275,0.35)
  silkscreen extent -0.42,0.67 -0.1,0.67, body extent -0.53,-0.53 0.53,0.53, height 0.4
SN74AXC2T245RSWR [mm] "QFN, 10-Leads, Body 1.40x1.80mm, Pitch 0.40mm, IPC Medium Density"
  rrect50% 0.7x0.2 smd: 1(-0.55,0.2)
  rrect50% 0.6x0.2 smd: 2(-0.6,-0.2) 6(0.6,-0.2) 7(0.6,0.2)
  rrect50% 0.2x0.6 smd: 3(-0.4,-0.8) 4(0,-0.8) 5(0.4,-0.8) 8(0.4,0.8) 9(0,0.8) 10(-0.4,0.8)
  silkscreen extent -0.89,0.51 -0.68,0.51, body extent -0.77,-0.97 0.77,0.97, height 0.55
SN74AXC4T774RSVR [mm] "QFN, 16-Leads, Body 1.80x2.60mm, Pitch 0.40mm, IPC Medium Density"
  rrect50% 0.7x0.2 smd: 1(-0.75,0.6)
  rrect50% 0.6x0.2 smd: 2(-0.8,0.2) 3(-0.8,-0.2) 4(-0.8,-0.6) 9(0.8,-0.6) 10(0.8,-0.2) 11(0.8,0.2) 12(0.8,0.6)
  rrect50% 0.2x0.6 smd: 5(-0.6,-1.2) 6(-0.2,-1.2) 7(0.2,-1.2) 8(0.6,-1.2) 13(0.6,1.2) 14(0.2,1.2) 15(-0.2,1.2) 16(-0.6,1.2)
  silkscreen extent -1.1,0.95 -0.9,0.95, body extent -0.97,-1.38 0.97,1.38, height 0.55
SN74LVC1G08DCKR [mm] "SOT23, 5-Leads, Body 2.00x2.10mm, Pitch 0.65mm, IPC Medium Density"
  rrect50% 0.85x0.4 smd: 1(-1.125,0.65) 2(-1.125,0) 3(-1.125,-0.65) 4(1.125,-0.65) 5(1.125,0.65)
  silkscreen extent -0.5,0.4 0.01,0.9, body extent -1.2,-1.08 1.2,1.07, height 1.1
SN74LVC1G14DRYR [mm] "PSON, 6-Leads, Body 1.45x1.00mm, Pitch 0.50mm, IPC Medium Density"
  rrect50% 0.35x0.2 smd: 1(-0.275,0.5)
  rrect50% 0.3x0.2 smd: 2(-0.3,0) 3(-0.3,-0.5) 4(0.3,-0.5) 5(0.3,0) 6(0.3,0.5)
  silkscreen extent -0.45,0.86 -0.12,0.86, body extent -0.53,-0.75 0.53,0.75, height 0.6